# Altium PCB PCB1.PcbDoc
Units mm, origin at the board's own origin, x right, y up, seen from the top; angles counter-clockwise.
Board outline 100 x 100 mm, 4 copper layers (Top Layer, GND, PWR, Bottom Layer), stack 1.592 mm thick; 58 components, 34 nets, 208 pads, 37 vias.
Unrouted connection lines stored in the file: 47.
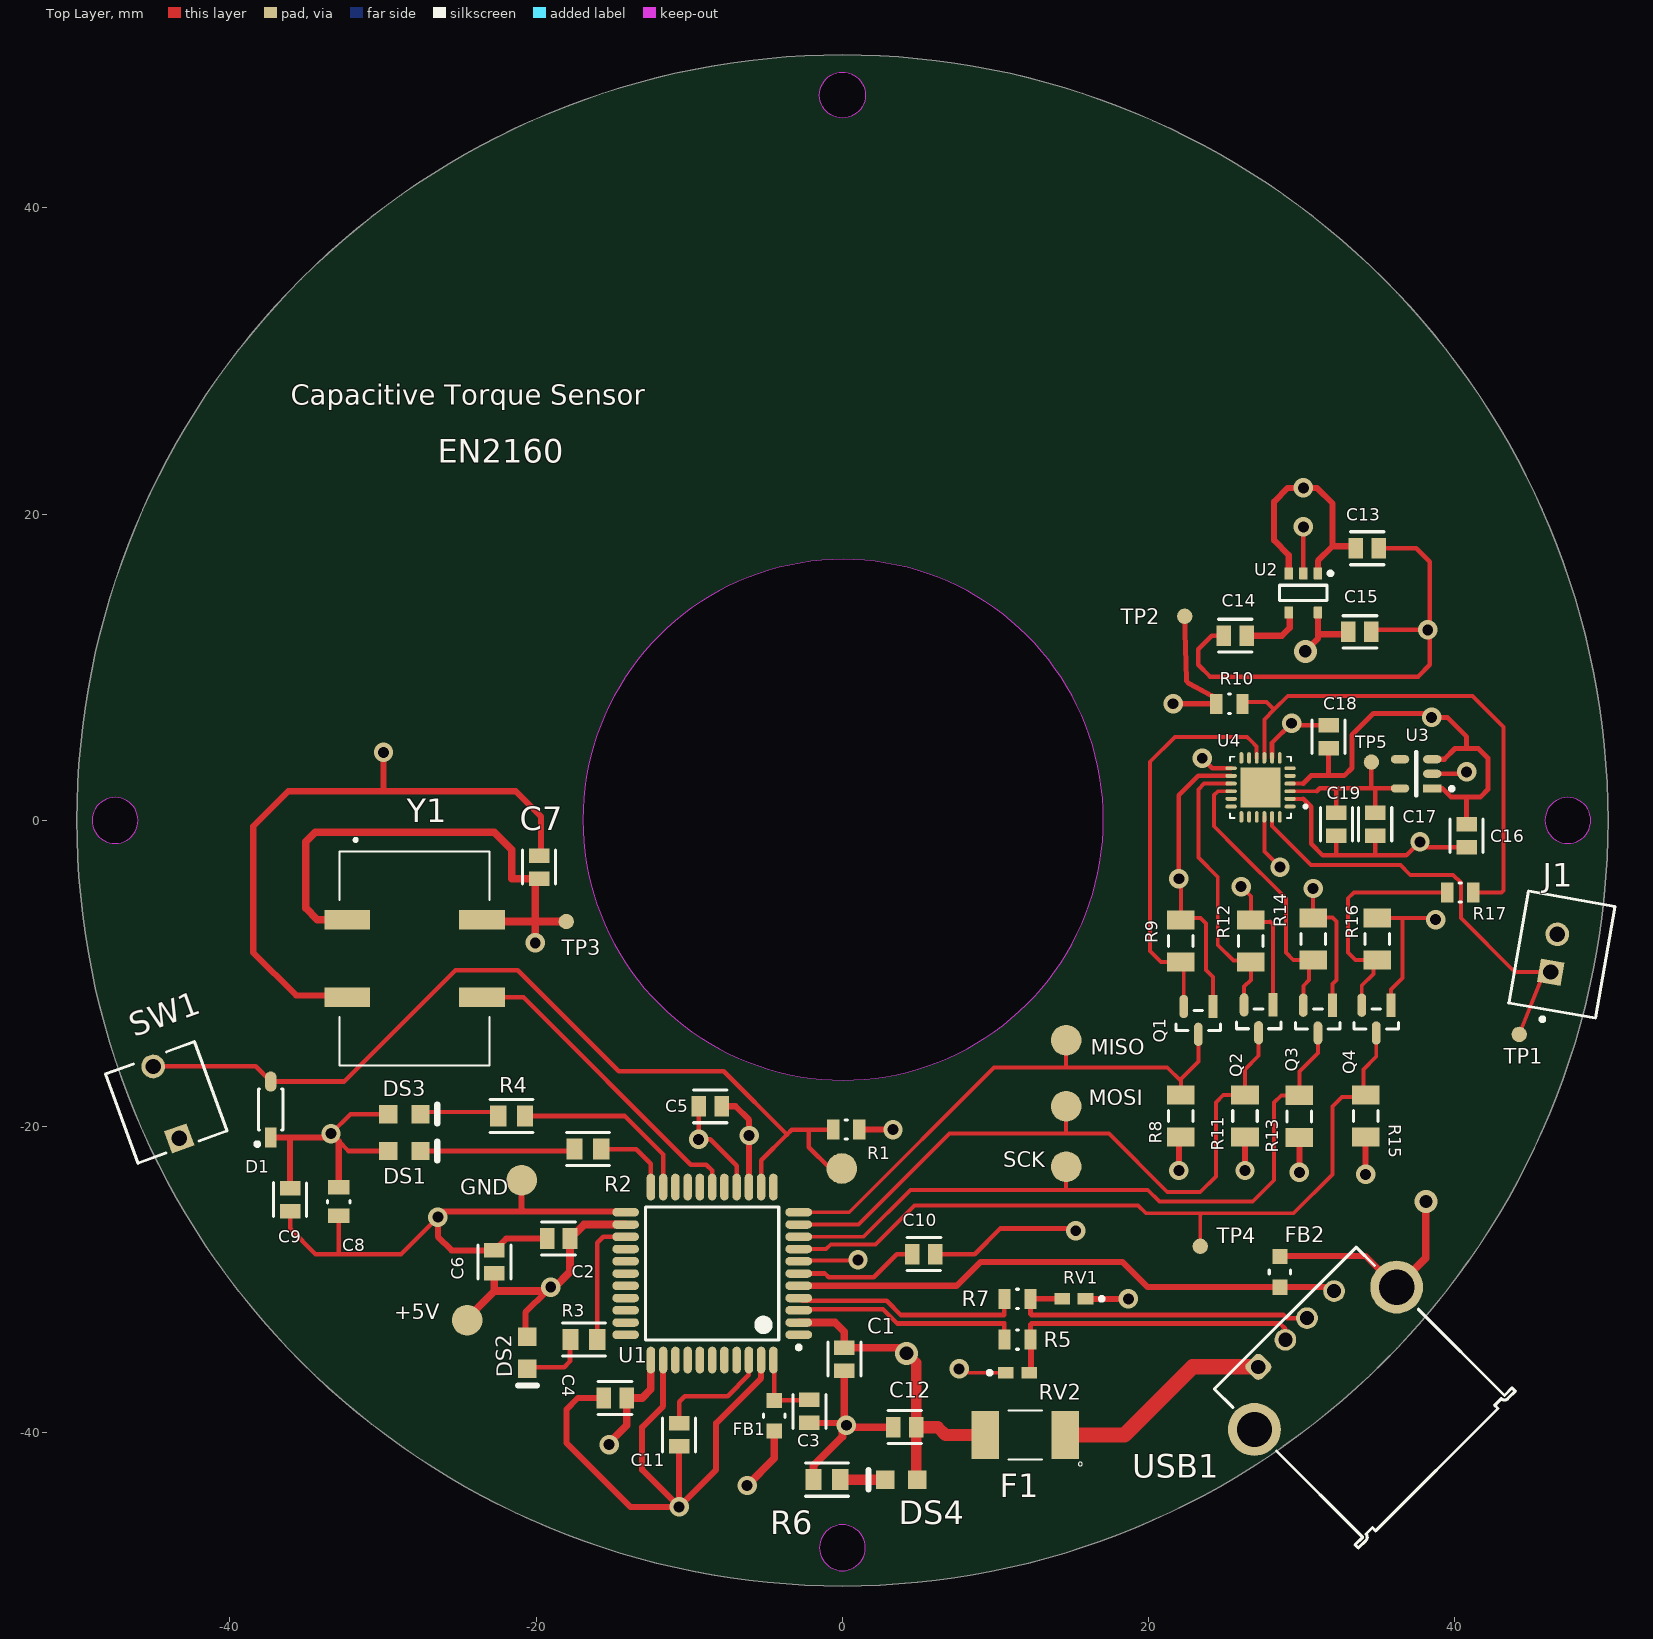
[diagram p0: Top Layer view]
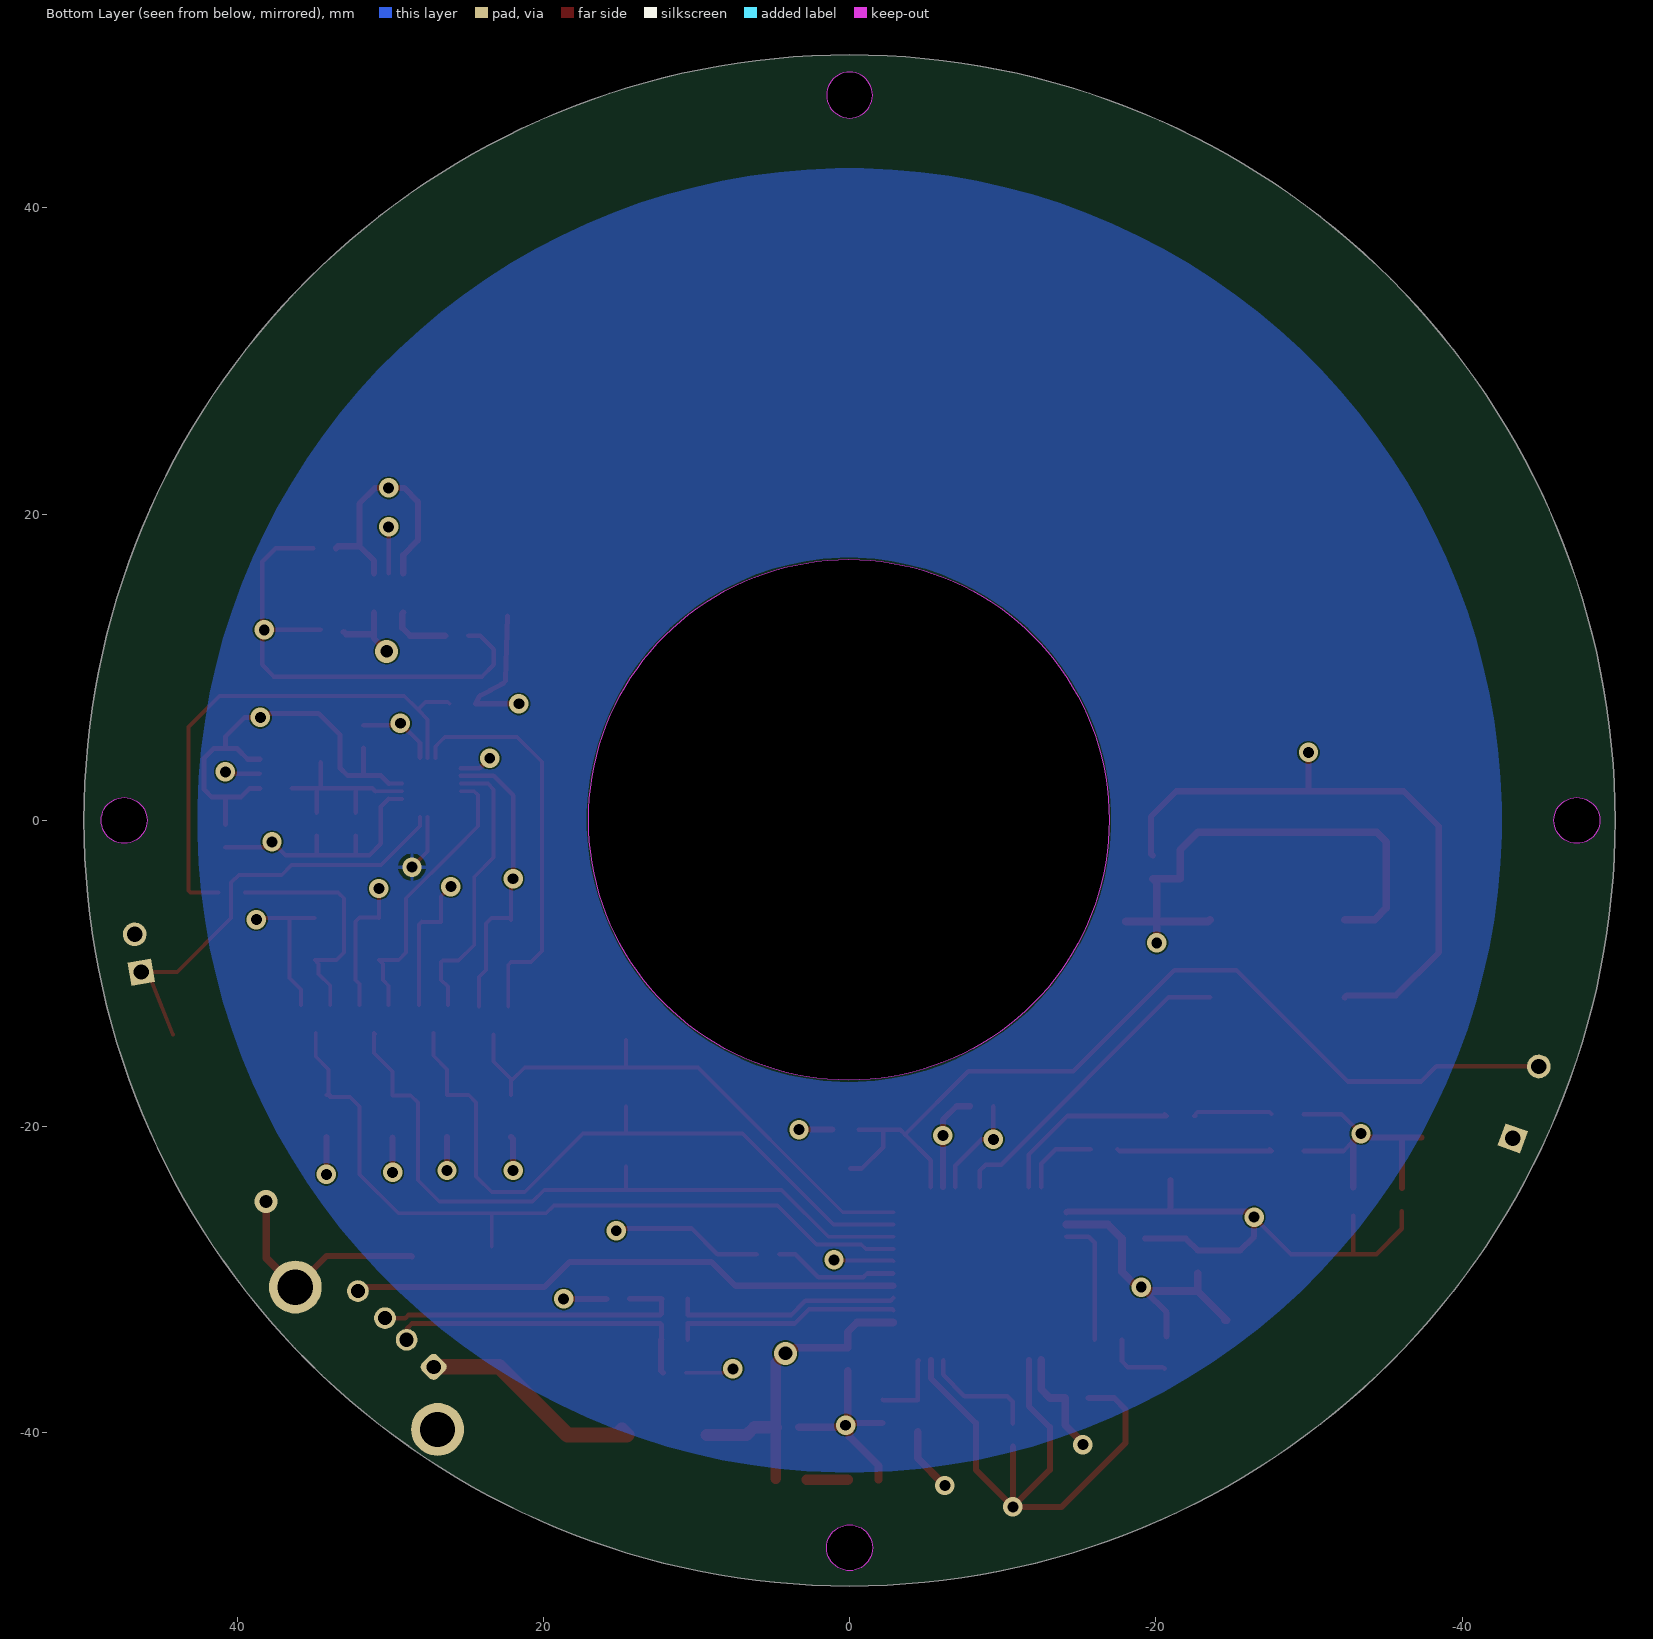
[diagram p1: Bottom Layer view, seen from below]
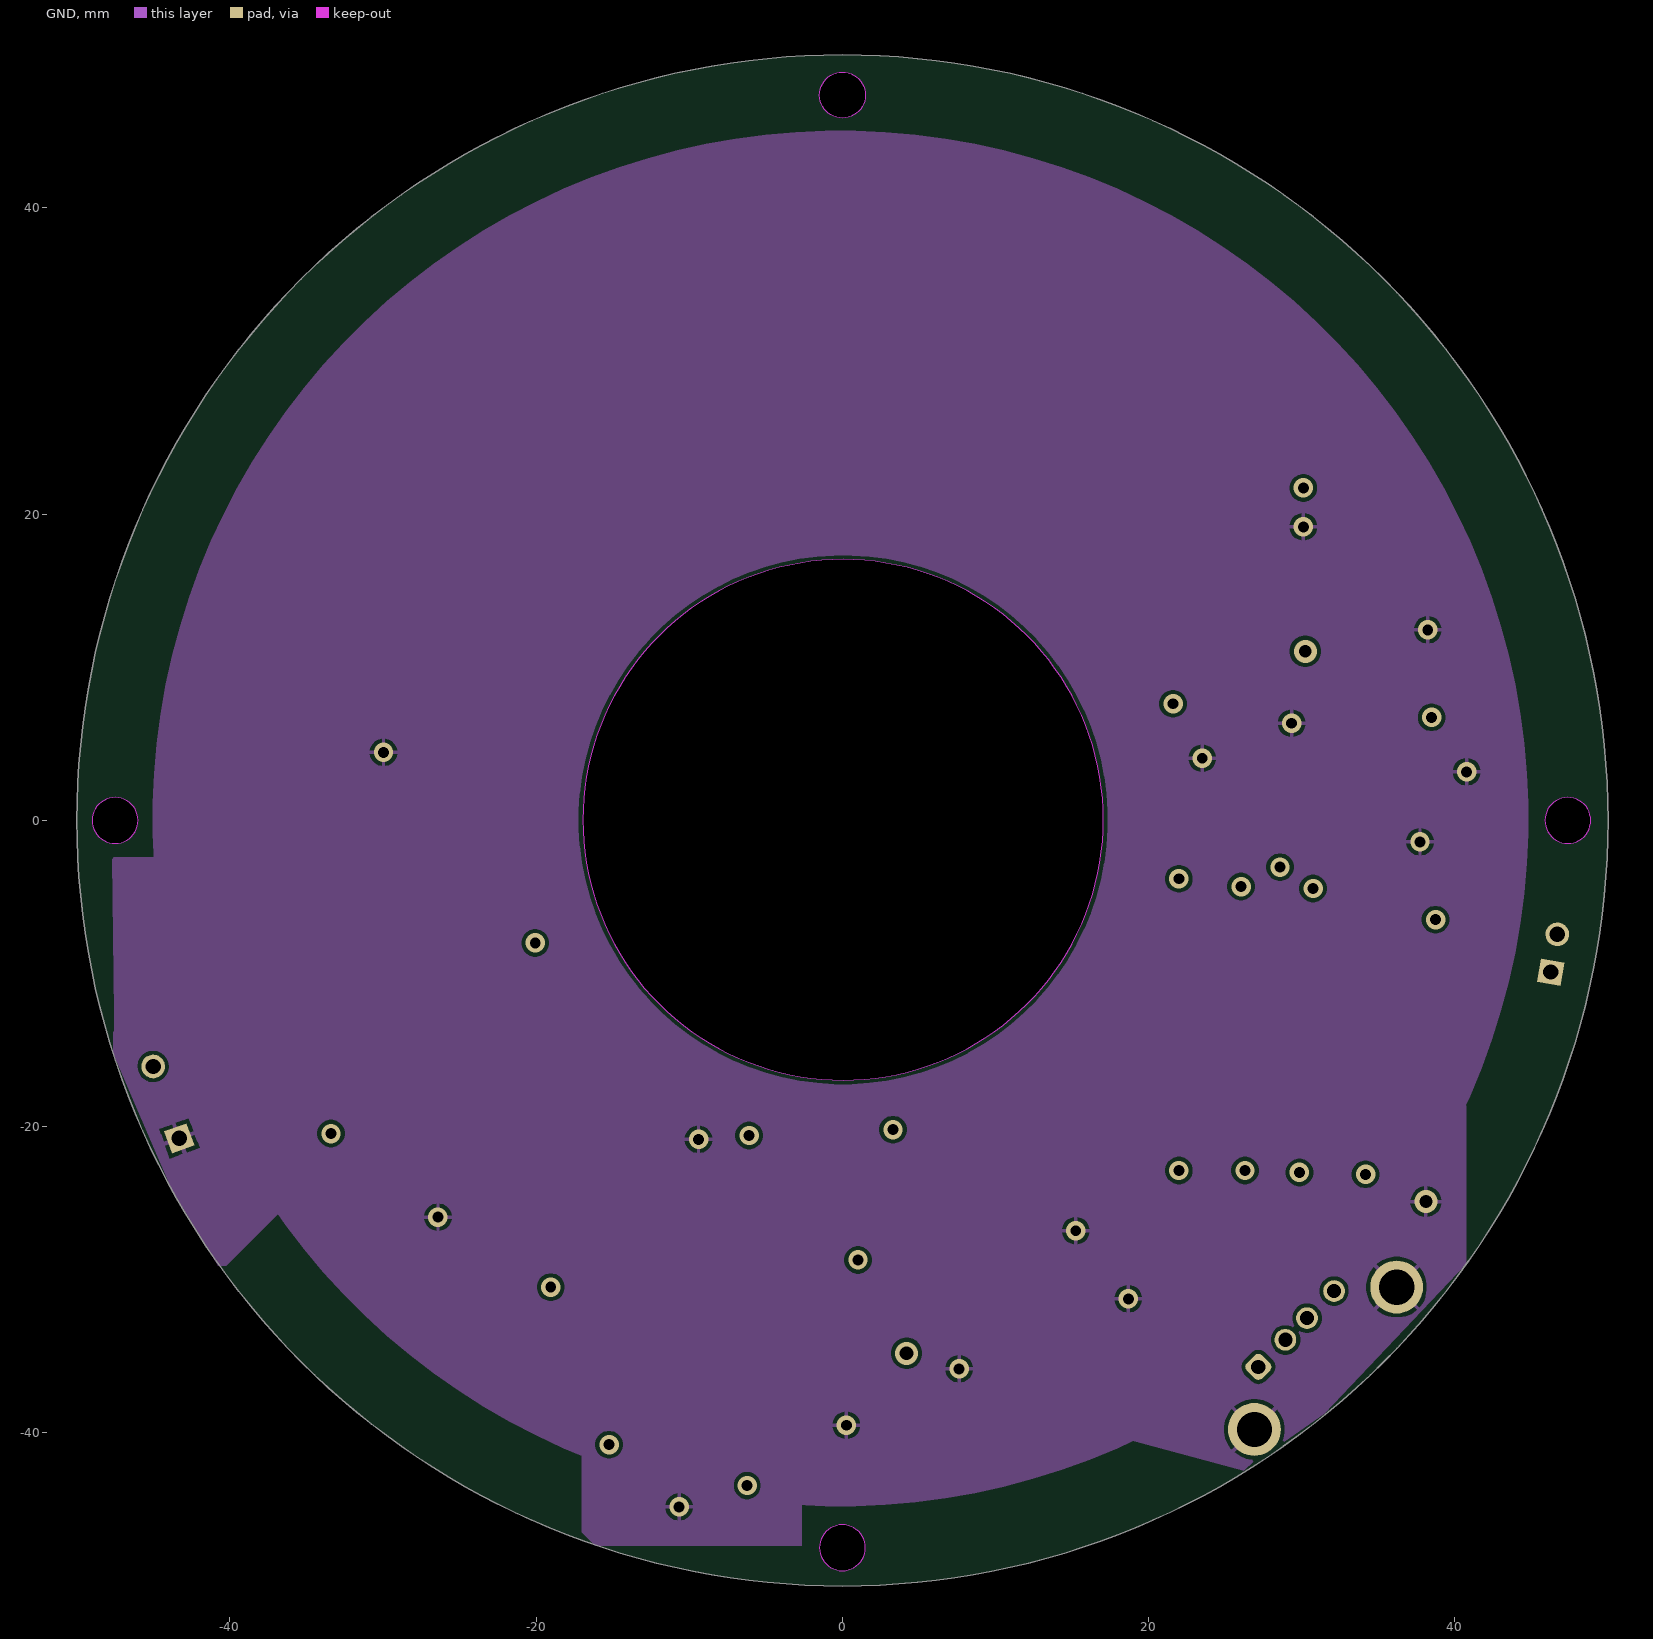
[diagram p2: GND]
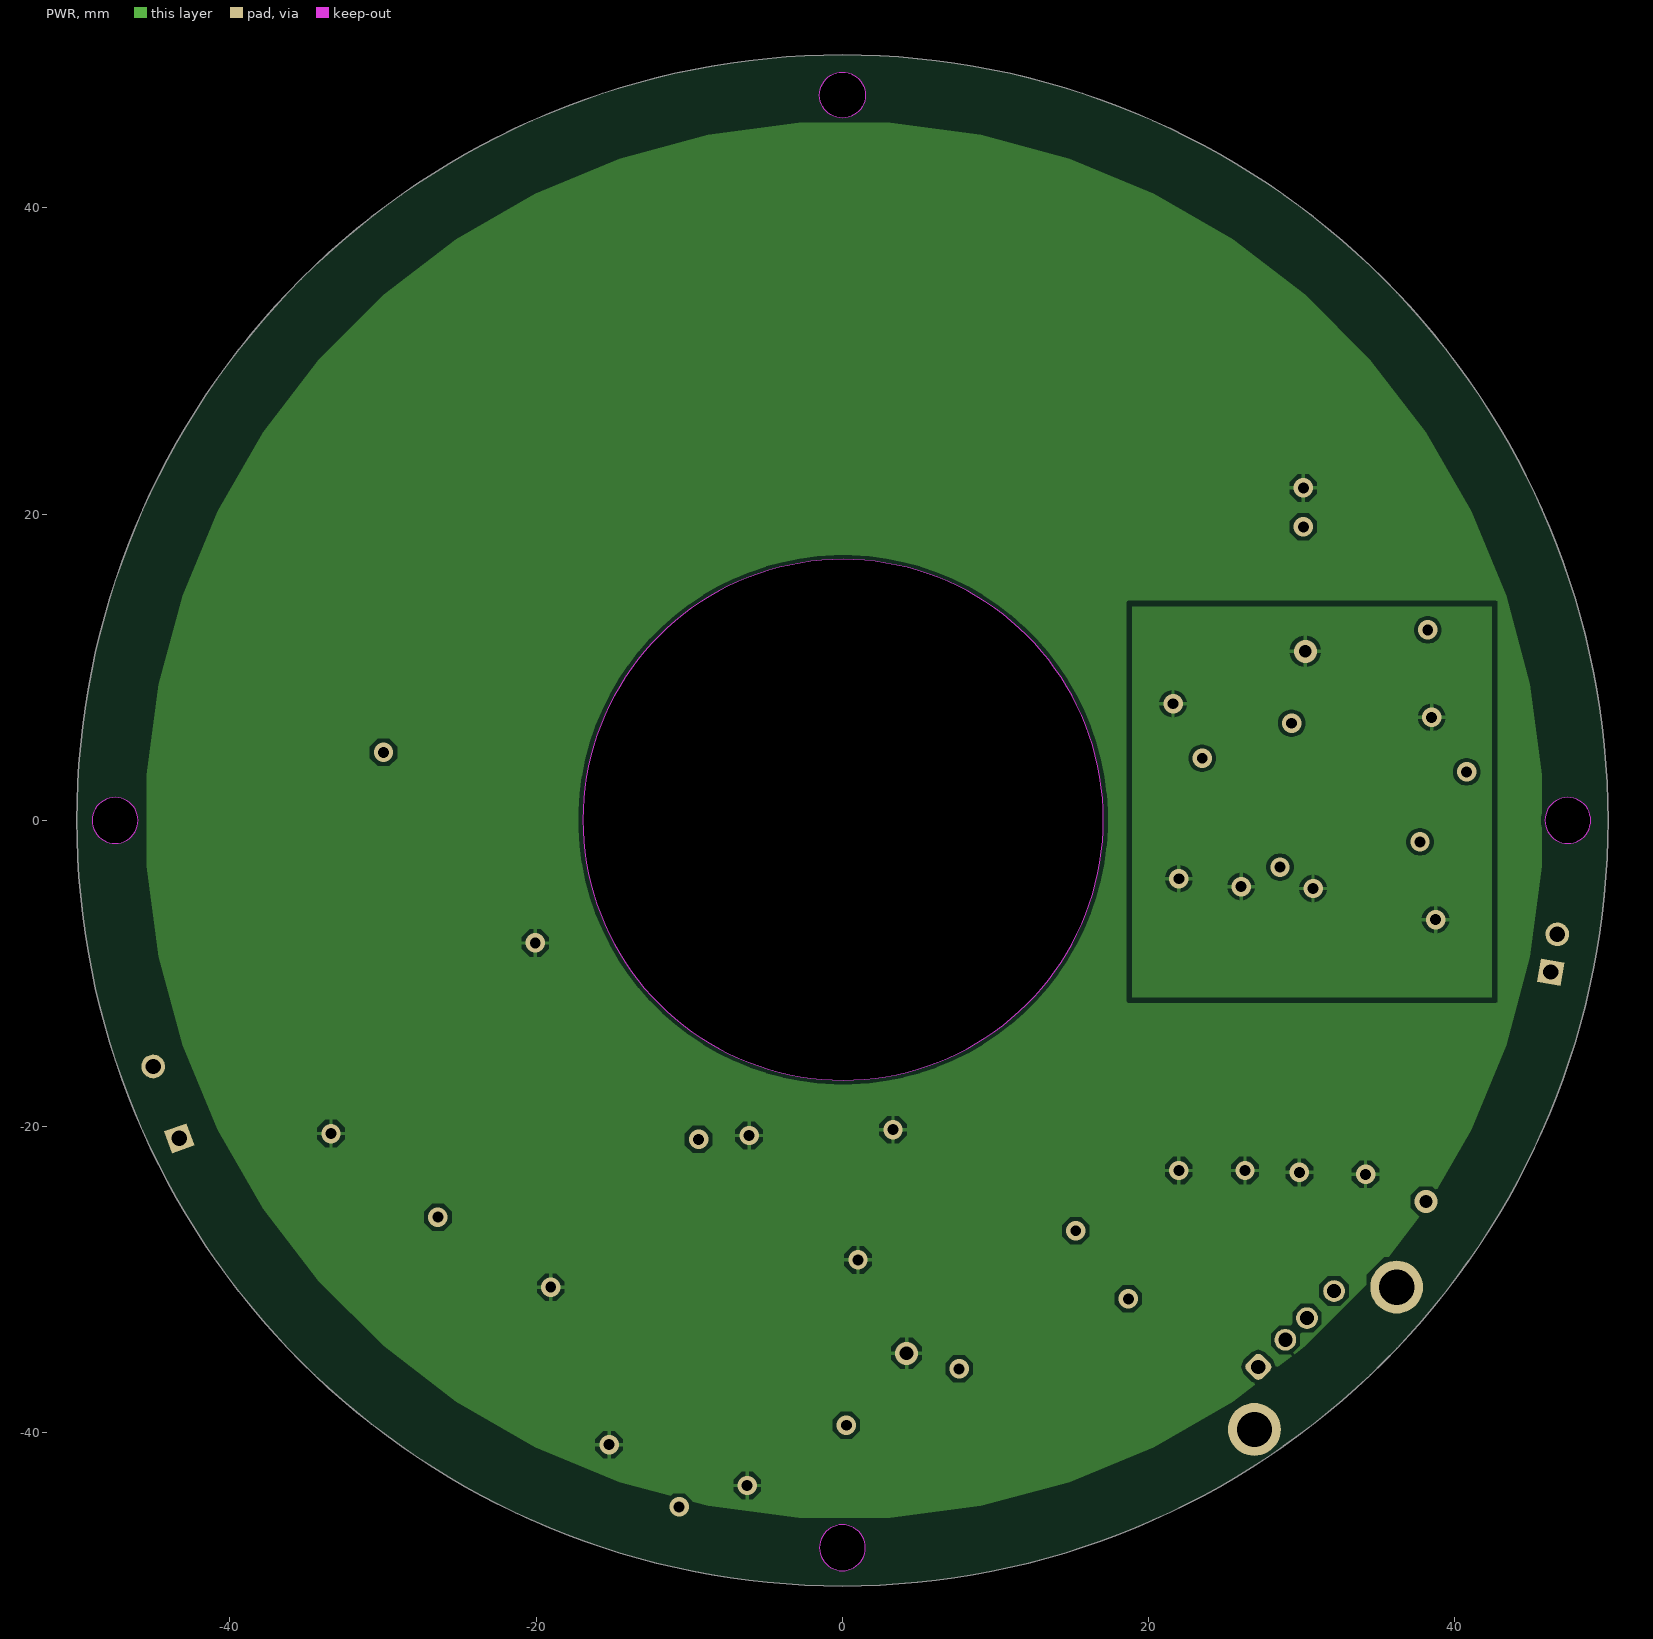
[diagram p3: PWR]
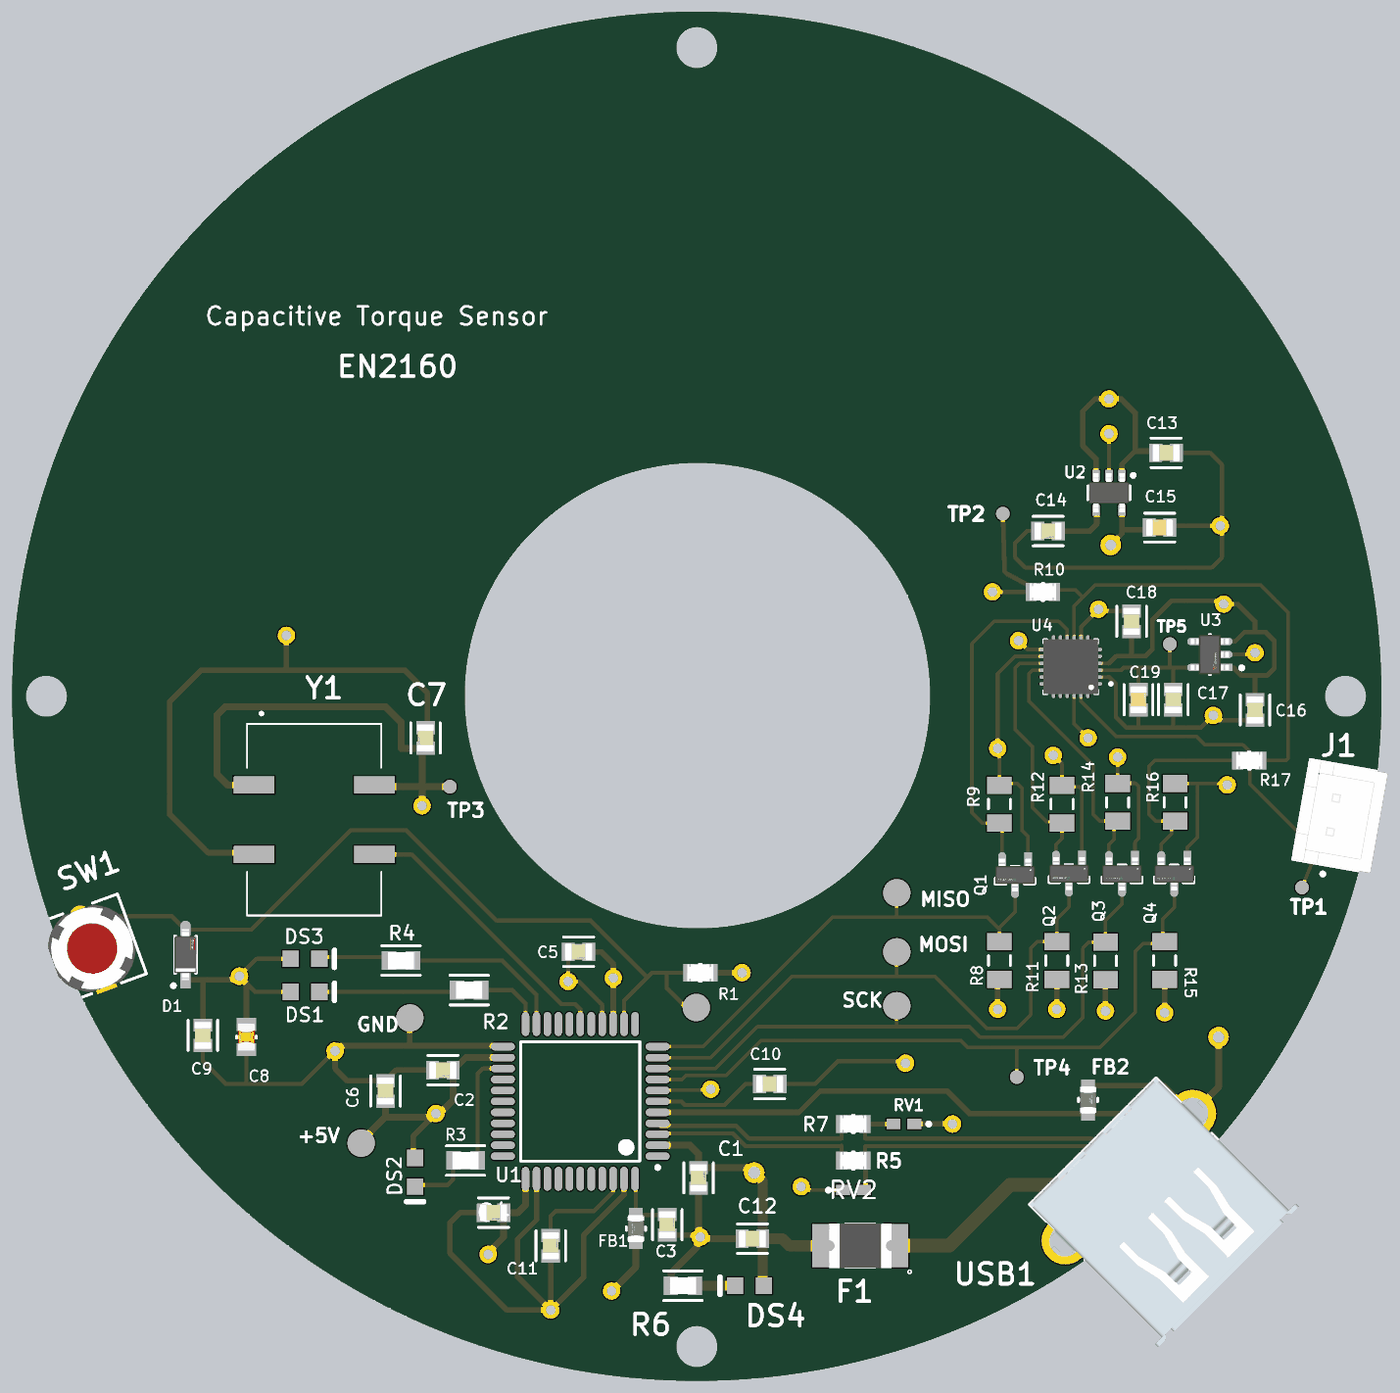
[diagram p4: 3D render of the assembled board from above, using the file's embedded part models]

## Layer stack, top to bottom
Top Solder: solder mask 0.0102, Solder Resist, Dk 3.5
Top Layer: signal copper 0.0356
Dielectric 2: prepreg 0.2104, PP-006, Dk 4.1
GND: signal copper 0.0175
Dielectric 1: dielectric 1.065, FR-4, Dk 4.8
PWR: signal copper 0.0175
Dielectric 3: prepreg 0.2104, PP-006, Dk 4.1
Bottom Layer: signal copper 0.0356
Bottom Solder: solder mask 0.0102, Solder Resist, Dk 3.5

## Board outline
-50,0 ccw(c0,0) 0,-50 ccw(c0,0) 50,0 ccw(c0,0) 0,50 ccw(c0,0)
cut-out: -16.956,0.044 ccw(c0.044,0.044) 0.044,-16.956 ccw(c0.044,0.044) 17.044,0.044 ccw(c0.044,0.044) 0.044,17.044 ccw(c0.044,0.044)
cut-out: -1.5,-47.498 ccw(c0,-47.498) 0,-48.998 ccw(c0,-47.498) 1.5,-47.498 ccw(c0,-47.498) 0,-45.998 ccw(c0,-47.498)
cut-out: 45.871,0 ccw(c47.371,0) 47.371,-1.5 ccw(c47.371,0) 48.871,0 ccw(c47.371,0) 47.371,1.5 ccw(c47.371,0)
cut-out: -47.498,-1.5 ccw(c-47.498,0) -45.998,0 ccw(c-47.498,0) -47.498,1.5 ccw(c-47.498,0) -48.998,0 ccw(c-47.498,0)
cut-out: 0,45.871 cw(c0,47.371) -1.5,47.371 cw(c0,47.371) 0,48.871 cw(c0,47.371) 1.5,47.371 cw(c0,47.371)

## Design rules (kind name [scope] priority, off if disabled: settings)
Clearance Clearance_1 [OnMid vs OnMid] p1: gap=0.1 ignorepadtopadclearanceinfootprint=FALSE
Clearance Clearance_2 [(ExistsOnLayer('Top Layer') Or ExistsOnLayer('Bottom Layer')) vs (ExistsOnLayer('Top Layer') Or ExistsOnLayer('Bottom Layer'))] p2: gap=0.1 ignorepadtopadclearanceinfootprint=FALSE
Clearance Clearance_3 [OnMid vs OnMid] p3: gap=0.2 ignorepadtopadclearanceinfootprint=FALSE
Clearance Clearance_4 [(ExistsOnLayer('Top Layer') Or ExistsOnLayer('Bottom Layer')) vs (ExistsOnLayer('Top Layer') Or ExistsOnLayer('Bottom Layer'))] p4: gap=0.2 ignorepadtopadclearanceinfootprint=FALSE
Clearance Clearance_5 [OnMid vs OnMid] p5: gap=0.254 ignorepadtopadclearanceinfootprint=FALSE
Clearance Clearance_6 [(ExistsOnLayer('Top Layer') Or ExistsOnLayer('Bottom Layer')) vs (ExistsOnLayer('Top Layer') Or ExistsOnLayer('Bottom Layer'))] p6: gap=0.254 ignorepadtopadclearanceinfootprint=FALSE
Clearance Clearance_1 [(ExistsOnLayer('GND') Or ExistsOnLayer('PWR')) vs (ExistsOnLayer('GND') Or ExistsOnLayer('PWR'))] p7: gap=0.254 ignorepadtopadclearanceinfootprint=FALSE sourcerule=45 cellrowname=All cellrowtype=0 cellcolname=All cellcoltype=0 innerlayers=TRUE
Clearance Clearance_2 [(ExistsOnLayer('Top Layer') Or ExistsOnLayer('Bottom Layer')) vs (ExistsOnLayer('Top Layer') Or ExistsOnLayer('Bottom Layer'))] p8: gap=0.254 ignorepadtopadclearanceinfootprint=FALSE sourcerule=45 cellrowname=All cellrowtype=0 cellcolname=All cellcoltype=0 outerlayers=TRUE
Clearance [All] p9: gap=0.254 ignorepadtopadclearanceinfootprint=FALSE miname0="All Nets" mitype0=2
DiffPairsRouting DifferentialPairsRouting_1 [All] p1: maxlimit=0.254 minlimit=0.254 mostfreqgap=0.254 toplayer_minwidth=0.254 toplayer_maxwidth=0.4 toplayer_prefwidth=0.3 midlayer1_minwidth=0.381 midlayer1_maxwidth=0.381 midlayer1_prefwidth=0.381 midlayer2_minwidth=0.381 midlayer2_maxwidth=0.381 midlayer2_prefwidth=0.381 bottomlayer_minwidth=0.254 bottomlayer_maxwidth=0.254 bottomlayer_prefwidth=0.254 maxuncoupledlength=0.254
DiffPairsRouting [All] p2: maxlimit=0.254 minlimit=0.254 mostfreqgap=0.254 toplayer_minwidth=0.381 toplayer_maxwidth=0.381 toplayer_prefwidth=0.381 midlayer1_minwidth=0.381 midlayer1_maxwidth=0.381 midlayer1_prefwidth=0.381 midlayer2_minwidth=0.381 midlayer2_maxwidth=0.381 midlayer2_prefwidth=0.381 bottomlayer_minwidth=0.381 bottomlayer_maxwidth=0.381 bottomlayer_prefwidth=0.381 maxuncoupledlength=12.7
MinimumSolderMaskSliver [All] p1: minsoldermaskwidth=0.024
PlaneClearance PowerPlaneClearance_1 [All] p1: clearance=0.7
PlaneClearance [All] p2: clearance=0.508
PolygonConnect [All] p1: connectstyle=Relief reliefconductorwidth=0.254 reliefentries=4 polygonreliefangle="90 Angle" airgapwidth=0.254
RoutingVias [All] p1: holewidth=0.711 width=1.27 viastyle="Through Hole" minholewidth=0.711 minwidth=1.27 maxholewidth=0.711 maxwidth=1.27
SilkToSolderMaskClearance [IsPad] p1: minsilkscreentomaskgap=0.19 clearancetoexposedcopper=TRUE
SolderMaskExpansion [All] p1: expansion=0.102 istentingtop=FALSE
Width [All] p1: maxlimit=2 minlimit=0.254 preferedwidth=0.254 midlayer1_maxwidth=0.4 midlayer2_maxwidth=0.4 minimp=50.000000 maximp=50.000000 favimp=50.000000
Width Width_1 [All] p2: maxlimit=2 minlimit=0.254 preferedwidth=0.254
26 further rules are at their usual default settings.

## Classes and differential pairs
component class U_USB: C12 DS4 F1 FB2 R5 R6 R7 RV1 RV2 USB1
component class U_Sensor: C18 C19 J1 Q1 Q2 Q3 Q4 R8 R9 R10 R11 R12 R13 R14 R15 R16 R17 U4
component class U_Power: C13 C14 C15 C16 C17 U2 U3
component class U_MCU: C1 C2 C3 C4 C5 C6 C7 C8 C9 C10 C11 D1 DS1 DS2 DS3 FB1 R1 R2 R3 R4 SW1 U1 Y1
differential pair D_D: +D_P -D_N
differential pair D_USB: +USB_P -USB_N

## Components (designator, comment, footprint, x,y, rotation, side; value= is the part's Value field where it differs from the comment)
C1 "C0805C104J8RACTU" FP-C0805C-DN-MFG 0.127,-35.179 r270 top value="0.10 μF"
C2 "C0805C104J8RACTU" FP-C0805C-DN-MFG -18.542,-27.305 r180 top value="0.10 μF"
C3 "C0805C104J8RACTU" FP-C0805C-DN-MFG -2.159,-38.596 r270 top value="0.10 μF"
C4 "C0805C104J8RACTU" FP-C0805C-DN-MFG -14.847,-37.719 r180 top value="0.10 μF"
C5 "C0805C104J8RACTU" FP-C0805C-DN-MFG -8.636,-18.669 r180 top value="0.10 μF"
C6 "C0805C106K8PACTU" FP-C0805C-DG-MFG -22.733,-28.829 r90 top value=10uF
C7 "C0805C104J8RACTU" FP-C0805C-DN-MFG -19.812,-3.048 r90 top value="0.10 μF"
C8 "CC0805KRX7R7BB104" FP-CC0805-0_85-MFG -32.893,-24.892 r270 top value="100 nF"
C9 "C0805C106K8PACTU" FP-C0805C-DG-MFG -36.068,-24.765 r270 top value=10uF
C10 "C0805C106K8PACTU" FP-C0805C-DG-MFG 5.322,-28.321 r0 top value=10uF
C11 "C0805C104J8RACTU" FP-C0805C-DN-MFG -10.668,-40.132 r270 top value="0.10 μF"
C12 "C0805C106K8PACTU" FP-C0805C-DG-MFG 4.064,-39.624 r180 top value=10uF
C13 "C0805C106K8PACTU" FP-C0805C-DG-MFG 34.278,17.78 r0 top value=10uF
C14 "10nF" FP-C0805C-DN-MFG 25.654,12.065 r180 top value="10,000 pF"
C15 "4.7uF" FP-C0805C475K8PACTU-MFG 33.794,12.319 r0 top
C16 "C0805C106K8PACTU" FP-C0805C-DG-MFG 40.767,-1.004 r270 top value=10uF
C17 "C0805C106K8PACTU" FP-C0805C-DG-MFG 34.798,-0.254 r270 top value=10uF
C18 "C0805C106K8PACTU" FP-C0805C-DG-MFG 31.75,5.473 r90 top value=10uF
C19 "4.7uF" FP-C0805C475K8PACTU-MFG 32.258,-0.254 r270 top
D1 "1N4148W-TP" FP-SOD-123-IPC_A -37.338,-18.876 r90 top
DS1 "HSMG-C170" AVAG-HSMX-C170_V -28.609,-21.59 r0 top
DS2 "HSMG-C170" AVAG-HSMX-C170_V -20.574,-34.764 r270 top
DS3 "HSMG-C170" AVAG-HSMX-C170_V -28.609,-19.177 r0 top
DS4 "HSMG-C170" AVAG-HSMX-C170_V 3.844,-43.053 r180 top
F1 "1812L050PR" FUSM4632X75 11.938,-40.132 r180 top
FB1 "MH2029-300Y" FP-MH2029-MFG -4.445,-38.878 r270 top value=30Ω
FB2 "MH2029-300Y" FP-MH2029-MFG 28.575,-29.48 r90 top value=30Ω
J1 "B2B-XH-A(LF)(SN)" FP-B2B-XH-A_LF_SN-MFG 46.99,-8.763 r80 top locked
Q1 "BSS138" FP-318-08-IPC_B 23.241,-13.06 r270 top
Q2 "BSS138" FP-318-08-IPC_B 27.178,-12.954 r270 top
Q3 "BSS138" FP-318-08-IPC_B 31.049,-12.975 r270 top
Q4 "BSS138" FP-318-08-IPC_B 34.864,-12.975 r270 top
R1 "CRCW080522R0FKEA" FP-CRCW0805-e3-IPC_C 0.254,-20.193 r0 top
R2 "330 R" FP-CR0805-IPC_B -16.625,-21.463 r180 top
R3 "330 R" FP-CR0805-IPC_B -16.891,-33.909 r180 top
R4 "330 R" FP-CR0805-IPC_B -21.602,-19.304 r180 top
R5 "CRCW080522R0FKEA" FP-CRCW0805-e3-IPC_C 11.43,-33.909 r180 top
R6 "330 R" FP-CR0805-IPC_B -1.016,-43.053 r0 top
R7 "CRCW080522R0FKEA" FP-CRCW0805-e3-IPC_C 11.43,-31.242 r180 top
R8 "10k" RESC3116X65X50NL20T20 22.098,-19.304 r270 top
R9 "10k" RESC3116X65X50NL20T20 22.098,-7.874 r90 top
R10 "CRCW080522R0FKEA" FP-CRCW0805-e3-IPC_C 25.273,7.62 r180 top
R11 "10k" RESC3116X65X50NL20T20 26.289,-19.304 r270 top
R12 "10k" RESC3116X65X50NL20T20 26.67,-7.874 r90 top
R13 "10k" RESC3116X65X50NL20T20 29.845,-19.326 r270 top
R14 "10k" RESC3116X65X50NL20T20 30.734,-7.747 r90 top
R15 "10k" RESC3116X65X50NL20T20 34.163,-19.304 r270 top
R16 "10k" RESC3116X65X50NL20T20 34.925,-7.747 r90 top
R17 "CRCW080522R0FKEA" FP-CRCW0805-e3-IPC_C 40.348,-4.699 r180 top
RV1 "CG0603MLC-05E" BOUR-CG0603-2_V 15.115,-31.242 r180 top
RV2 "CG0603MLC-05E" BOUR-CG0603-2_V 11.43,-36.068 r0 top
SW1 "EVQ-11L05R" FP-EVQ-11L05R-MFG -44.162,-18.415 r110 top
U1 "ATmega32U4RC-AU" 44ML_N -8.509,-29.591 r180 top
U2 "TPS73633DBVR" DBV0005A_L 30.099,14.859 r270 top
U3 "LP5907MFX-2.85/NOPB" FP-DBV0005A-IPC_C 37.465,3.048 r180 top
U4 "PCAP04-AQFM-24" IC_PCAP04-AQFM-24 27.305,2.159 r180 top
USB1 "61400416021" 61400416021 33.869,-37.445 r45 top
Y1 "ECS-8FMX-160-TR" OSC_ECS-8FMX-160-TR -27.94,-9.017 r270 top

## Footprints (in the part's own frame and the unit in brackets; to place one, negate y for a bottom-side part, rotate by r counter-clockwise, add the part's x,y. Pads: shape width x height; smd on the part's side, far side on the other; paste and mask are expansions set on the pad)
44ML_N [mm] "Thin QFP, 44-Leads, Body 10x10mm, Pitch 0.8mm, IPC Medium Density"
  oval 1.75x0.55 smd: 1(-5.65,4) 2(-5.65,3.2) 3(-5.65,2.4) 4(-5.65,1.6) 5(-5.65,0.8) 6(-5.65,0) 7(-5.65,-0.8) 8(-5.65,-1.6) 9(-5.65,-2.4) 10(-5.65,-3.2) 11(-5.65,-4) 23(5.65,-4) 24(5.65,-3.2) 25(5.65,-2.4) 26(5.65,-1.6) 27(5.65,-0.8) 28(5.65,0) 29(5.65,0.8) 30(5.65,1.6) 31(5.65,2.4) 32(5.65,3.2) 33(5.65,4)
  oval 0.55x1.75 smd: 12(-4,-5.65) 13(-3.2,-5.65) 14(-2.4,-5.65) 15(-1.6,-5.65) 16(-0.8,-5.65) 17(0,-5.65) 18(0.8,-5.65) 19(1.6,-5.65) 20(2.4,-5.65) 21(3.2,-5.65) 22(4,-5.65) 34(4,5.65) 35(3.2,5.65) 36(2.4,5.65) 37(1.6,5.65) 38(0.8,5.65) 39(0,5.65) 40(-0.8,5.65) 41(-1.6,5.65) 42(-2.4,5.65) 43(-3.2,5.65) 44(-4,5.65)
  silkscreen extent -5.77,-4.35 4.35,4.95, body extent -5,-5 5,5, height 1.2
61400416021 [mm] "USB 2.0 Type A Horizontal"
  rrect50% 1.42x1.42 hole 0.92: 1(-3.5,5.99)
  round 1.42 hole 0.92: 2(-1,5.99) 3(1,5.99) 4(3.5,5.99)
  round 3.45 hole 2.3: Shell(-6.57,3.28) Shell(6.57,3.28)
  silkscreen extent -7.25,-7 7.25,7, body extent -8,-7 8,7, height 7.63
AVAG-HSMX-C170_V [mm] "SMD, 2-Leads, Body 2x1.25mm, Height 0.8mm"
  rect 1.2x1.2 smd: 1(-1.05,0) 2(1.05,0)
  silkscreen extent 2.15,-0.62 2.15,0.62, body extent -1,-0.63 1,0.63, height 0.8
BOUR-CG0603-2_V [mm] "SMD, 2-Leads, Body 1.6x0.8mm, Pitch 1.52mm"
  rect 1.02x0.76 smd: 1(-0.76,0) 2(0.76,0)
  silkscreen extent -1.94,-0.12 -1.7,0.12, body extent -0.8,-0.4 0.8,0.4, height 0.55
DBV0005A_L [mm] "SOT23, 5-Leads, Body 3.05x1.75mm, Pitch 0.95mm, IPC High Density"
  rrect18% 0.8x0.55 smd: 1(-1.275,0.95) 2(-1.275,0) 3(-1.275,-0.95) 4(1.275,-0.95) 5(1.275,0.95)
  silkscreen extent -1.4,-1.55 0.5,1.9, body extent -1.42,-1.46 1.42,1.46, height 1.08
FP-318-08-IPC_B [mm]
  rect 1.524x0.578 smd paste+0 mask+0: 1(-0.91,0.95)
  rrect100% 1.524x0.578 smd paste+0 mask+0: 2(-0.91,-0.95) 3(0.91,0)
  silkscreen extent -0.65,-1.45 0.65,1.45, body extent -1.92,-1.7 1.92,1.7, height 0.25
FP-B2B-XH-A_LF_SN-MFG [mm]
  rect 1.55x1.55 hole 1 paste-2539.97 mask+0: 1(-1.25,0.525)
  round 1.55 hole 1 paste-2539.97 mask+0: 2(1.25,0.525)
  silkscreen extent -4.5,-2.87 3.7,2.88, body extent -3.8,-2.98 3.8,2.98, height 0.25
FP-C0805C475K8PACTU-MFG [mm]
  rect 0.95x1.35 smd paste+0 mask+0: 1(-0.75,0) 2(0.75,0)
  silkscreen extent -1.1,-1.05 1.1,1.05, body extent -1.4,-0.85 1.4,0.85, height 0.25
FP-C0805C-DG-MFG [mm]
  rect 0.95x1.35 smd paste+0 mask+0: 1(-0.75,0) 2(0.75,0)
  silkscreen extent -1.11,-1.08 1.1,1.07, body extent -1.4,-0.85 1.4,0.85, height 0.25
FP-C0805C-DN-MFG [mm]
  rect 0.95x1.35 smd paste+0 mask+0: 1(-0.75,0) 2(0.75,0)
  silkscreen extent -1.1,-1.07 1.1,1.07, body extent -1.4,-0.85 1.4,0.85, height 0.25
FP-CC0805-0_85-MFG [mm]
  rect 0.95x1.4 smd paste+0 mask+0: 1(-0.925,0) 2(0.925,0)
  silkscreen extent -0.07,-0.73 0.07,0.73, body extent -1.6,-1.05 1.6,1.05, height 0.25
FP-CR0805-IPC_B [mm]
  rect 1.058x1.362 smd paste+0 mask+0: 1(-0.877,0) 2(0.877,0)
  silkscreen extent -1.41,-1.08 1.41,1.08, body extent -1.66,-0.93 1.66,0.93, height 0.25
FP-CRCW0805-e3-IPC_C [mil]
  rect 31.75x51.5 smd paste+0 mask+0: 1(-33.5,0) 2(33.5,0)
  silkscreen extent -3,-25 3,25, body extent -53,-31 53,31, height 10
FP-DBV0005A-IPC_C [mm]
  rect 1.205x0.532 smd paste+0 mask+0: 1(-1.05,0.95)
  rrect100% 1.205x0.532 smd paste+0 mask+0: 2(-1.05,0) 3(-1.05,-0.95) 4(1.05,-0.95) 5(1.05,0.95)
  silkscreen extent -2.45,-1.45 0.05,1.45, body extent -1.75,-1.55 1.75,1.55, height 0.25
FP-EVQ-11L05R-MFG [mm]
  rect 1.55x1.55 hole 1 paste-2539.97 mask+0: A(-2.5,0)
  round 1.55 hole 1 paste-2539.97 mask+0: B(2.5,0)
  silkscreen extent -3.1,-3.1 3.1,3.1, body extent -3.37,-3.2 3.37,3.2, height 0.25
FP-MH2029-MFG [mm]
  rect 1x1 smd paste+0 mask+0: 1(-1,0) 2(1,0)
  silkscreen extent -0.13,-0.7 0.13,0.7, body extent -1.6,-0.8 1.6,0.8, height 0.25
FP-SOD-123-IPC_A [mm]
  rect 1.308x0.762 smd paste+0 mask+0: 1(-1.825,0)
  rrect100% 1.308x0.762 smd paste+0 mask+0: 2(1.825,0)
  silkscreen extent -2.39,-0.8 1.35,1.01, body extent -2.98,-1.3 2.98,1.3, height 0.25
FUSM4632X75 [mm]
  rect 1.78x3.15 smd: 1(-2.615,0) 2(2.615,0)
  silkscreen extent -3.73,-1.6 1.1,2.03, body extent -2.27,-1.62 2.27,1.62, height 1.25
IC_PCAP04-AQFM-24 [mm]
  oval 0.75x0.25 smd mask+0.05: 1(-1.925,1.25) 2(-1.925,0.75) 3(-1.925,0.25) 4(-1.925,-0.25) 5(-1.925,-0.75) 6(-1.925,-1.25) 13(1.925,-1.25) 14(1.925,-0.75) 15(1.925,-0.25) 16(1.925,0.25) 17(1.925,0.75) 18(1.925,1.25)
  oval 0.25x0.75 smd mask+0.05: 7(-1.25,-1.925) 8(-0.75,-1.925) 9(-0.25,-1.925) 10(0.25,-1.925) 11(0.75,-1.925) 12(1.25,-1.925) 19(1.25,1.925) 20(0.75,1.925) 21(0.25,1.925) 22(-0.25,1.925) 23(-0.75,1.925) 24(-1.25,1.925)
  rect 2.6x2.6 smd paste-0.48 mask+0.05: 25(0,0)
  silkscreen extent -3.04,-2 2,2, body extent -2,-2 2,2, height 1
OSC_ECS-8FMX-160-TR [mm]
  rect 1.27x3 smd: 1(-2.54,-4.4) 2(2.54,-4.4) 3(2.54,4.4) 4(-2.54,4.4)
  silkscreen extent -7.85,-4.9 7,4.9
RESC3116X65X50NL20T20 [mm] "Chip Resistor, 2-Leads, Body 3.10x1.60mm, IPC Medium Density"
  rect 1.25x1.8 smd: 1(-1.375,0) 2(1.375,0)
  silkscreen extent -0.35,-0.8 0.35,0.8, body extent -1.65,-0.9 1.65,0.9, height 0.65

## Part data
C1 C2 C3 C4 C5 C7 C11: library part CMP-03020-032188-1, "CAP CER 0.1UF 10V 5% X7R 0805", Capacitance="0.10 μF", Manufacturer=KEMET, Package=C0805C-DN, Temperature="-55°C to +125°C", Temperature Characteristic=X7R, Temperature Coefficient=30ppm/°C, Temperature Range High=+125°C, Temperature Range Low=-55°C, Tolerance=0.05, Voltage Rating="10 V", Automotive=No, Category=Cap, ComponentLink2Description=Datasheet, ComponentLink2URL=https://content.kemet.com/datasheets/KEM_C1003_C0G_SMD.pdf, Device Class L1="Passive Components", Device Class L2=Capacitors, Device Class L3="Ceramic Capacitors", Digikey Description="CAP CER 0.1UF 10V 5% X7R 0805", Height=0.88mm, Ipc Land Pattern Name=CAPC200125X78, Lead Free=Yes, Manufacturer Part Number=C0805C104J8RACTU, Material=Ceramic, Mouser Description="Multilayer Ceramic Capacitors MLCC - SMD/SMT 10volts 0.1uF X7R 5%", Octopart=https://octopart.com/c0805c104j8ractu-kemet-11807087, RoHS=TRUE
C6 C12 C18: library part CMP-2007-03243-2, "CAP CER 10UF 10V X5R 0805", 3DS Part Number=220-00001, Capacitance=10uF, Manufacturer=Kemet, Package=C0805C-DG, Temperature="-55°C to +85°C", Temperature Characteristic=X5R, Temperature Coefficient=15%, Temperature Range High=+85°C, Temperature Range Low=-55°C, Tolerance=10%, Voltage=10V, Automotive=No, Category=Cap, ComponentLink2Description=Datasheet, ComponentLink2URL=https://content.kemet.com/datasheets/KEM_C1006_X5R_SMD.pdf, Device Class L1="Passive Components", Device Class L2=Capacitors, Device Class L3="Ceramic Capacitors", Digikey Description="CAP CER 10UF 10V X5R 0805", Height=1.4mm, Ipc Land Pattern Name=CAPC200125X125, Lead Free=Yes, Manufacturer Part Number=C0805C106K8PACTU, Material=Ceramic, Mouser Description="CAP CER 10UF 10V X5R 0805", Octopart=https://octopart.com/c0805c106k8pactu-kemet-98697, RoHS=TRUE, Voltage Rating=10V
C8: library part CMP-1036-04402-6, "CAP CER 0.1UF 16V X7R 0805", Capacitance="100 nF", Manufacturer=Yageo, Package=CC0805-0.85, Temperature="-30°C to +85°C", Temperature Characteristic=X7R, Temperature Range High=+85°C, Temperature Range Low=-30°C, Tolerance=0.1, Voltage Rating="16 V", Automotive=No, Category=Cap, ComponentLink2Description=Datasheet, ComponentLink2URL=http://www.yageo.com/documents/recent/UPY-GPHC_Y5V_6.3V-to-50V_8.pdf, Device Class L1="Passive Components", Device Class L2=Capacitors, Device Class L3="Ceramic Capacitors", Digikey Description="CAP CER 0.1UF 16V X7R 0805", Footprint Url=http://www.yageo.com/exep/pages/download/literatures/UPY-C_GEN_24.pdf, Height=0.95mm, Ipc Land Pattern Name=CAPC200125X85, Lead Free=Yes, Manufacturer Part Number=CC0805KRX7R7BB104, Material=Ceramic, Mouser Description="Multilayer Ceramic Capacitors MLCC - SMD/SMT 100nF 16V X7R 10%", Octopart=https://octopart.com/cc0805krx7r7bb104-yageo-39467769, RoHS=TRUE
C9 C10 C13 C16 C17: library part CMP-2007-03243-2, "CAP CER 10UF 10V X5R 0805", 3DS Part Number=220-00001, Capacitance=1uF, Manufacturer=Kemet, Package=C0805C-DG, Temperature="-55°C to +85°C", Temperature Characteristic=X5R, Temperature Coefficient=15%, Temperature Range High=+85°C, Temperature Range Low=-55°C, Tolerance=10%, Voltage=10V, Automotive=No, Category=Cap, ComponentLink2Description=Datasheet, ComponentLink2URL=https://content.kemet.com/datasheets/KEM_C1006_X5R_SMD.pdf, Device Class L1="Passive Components", Device Class L2=Capacitors, Device Class L3="Ceramic Capacitors", Digikey Description="CAP CER 10UF 10V X5R 0805", Height=1.4mm, Ipc Land Pattern Name=CAPC200125X125, Lead Free=Yes, Manufacturer Part Number=C0805C106K8PACTU, Material=Ceramic, Mouser Description="CAP CER 10UF 10V X5R 0805", Octopart=https://octopart.com/c0805c106k8pactu-kemet-98697, RoHS=TRUE, Voltage Rating=10V
C14: library part CMP-2007-00493-2, "CAP CER 10000PF 25V 5% NP0 0805", Capacitance="10,000 pF", Manufacturer=KEMET, Manufacturer Part Number=C0805C103J3GACTU, Package=C0805C-DN, Temperature="-55°C to +125°C", Temperature Characteristic=C0G, Temperature Coefficient=30ppm/°C, Temperature Range High=+125°C, Temperature Range Low=-55°C, Tolerance=0.05, Voltage Rating="25 V", Automotive=No, Category=Cap, ComponentLink2Description=Datasheet, ComponentLink2URL=https://content.kemet.com/datasheets/KEM_C1003_C0G_SMD.pdf, Device Class L1="Passive Components", Device Class L2=Capacitors, Device Class L3="Ceramic Capacitors", Digikey Description="CAP CER 10000PF 25V 5% NP0 0805", Height=0.88mm, Ipc Land Pattern Name=CAPC200125X78, Lead Free=Yes, Material=Ceramic, Mouser Description="Multilayer Ceramic Capacitors MLCC - SMD/SMT 25volts 10000pF 5% C0G", Octopart=https://octopart.com/c0805c103j3gactu-kemet-12563663, RoHS=TRUE
C15 C19: library part CMP-2007-01007-2, "CAP CER 4.7UF 10V X5R 0805", Case Code (Imperial)=0805, Case Code (Metric)=2012, Dielectric=X5R, Dielectric Material=Ceramic, Max Operating Temperature=85°C, Min Operating Temperature=-55°C, Package Quantity=1, Tolerance=10%, Voltage=10V, Capacitance=4.7uF, Case/Package=0805, Construction=Flat, Depth=1.25mm, Dissipation Factor=5%, Height=1.25mm, Lead Free="Lead Free", Lead Pitch=0.75mm, Length=2mm, Mount="Surface Mount", Number of Pins=2, Packaging="Tape and Reel", Radiation Hardening=No, REACH SVHC="No SVHC", RoHS Compliant=Yes, Series=C, Termination=SMD/SMT, Thickness=0.055inch, Voltage Rating=10V, Voltage Rating (DC)=10V, Width=1.2mm
D1: library part CMP-2000-04993-2, "DIODE GEN PURP 100V 150MA SOD123", Average Rectified Current=150mA, Capacitance=4pF, Forward Voltage=1V, Max Forward Surge Current (Ifsm)=1A, Max Operating Temperature=150°C, Max Repetitive Reverse Voltage (Vrrm)=100V, Max Reverse Leakage Current=5uA, Max Surge Current=2A, Min Operating Temperature=-65°C, Package Quantity=3000, Power Dissipation=400mW, Current Rating=150mA, Element Configuration=Single, Forward Current=150mA, Height=1.2mm, Lead Free="Lead Free", Length=2.85mm, Max Reverse Voltage (DC)=100V, Mount="Surface Mount", Number of Pins=2, Output Current=150mA, Packaging="Tape and Reel", Peak Non-Repetitive Surge Current=2A, Polarity=Standard, Radiation Hardening=No, Recovery Time=4ns, Reverse Recovery Time=4ns, Voltage Rating (DC)=100V, Width=1.8mm
DS1 DS2 DS3 DS4: library part CMP-2000-05062-1, "Chip LED, Green, 2.2 V, -40 to 85 degC, 2-Pin SMD, Pb-Free, Tape and Reel", Forward Current If=20mA, Forward Voltage=2.2V, Forward Voltage VF Max=2.6V, LED Colour=Green, Manufacturer=Avago, Operating Temperature Max=85degC, Operating Temperature Min=-30degC, Operating Temperature Range=-30degCto+85degC, Opto Case Style=SMD, Package Description="2-Pin Surface Mount Device, Body 2 x 1.25 mm, Height 0.8 mm", Package Reference=HSMX-C170, Storage Temperature Min=-40degC, Bulb Size=1.25mmx1.4mm, Datasheet URL=https://datasheet.ciiva.com/29280/180495-da-01-en-chip-led-hsmg-c170-gelb-gruen-29280971.pdf, Datasheet Version=Oct-08, Dominant Wavelength=572nm, Dominant Wavelength Typ=572nm, External Depth=0.8mm, External Length / Height=2mm, External Width=1.25mm, Forward Current If Max=20mA, LED Mounting=SMD, LED Type=Standard, Lens Shape=Rectangular, Light Area Height=1mm, Luminous Intensity=15mcd, Luminous Intensity Min=4mcd, Luminous Intensity Typ=15mcd, Manufacturer URL=http://www.avagotech.com/, Mounting Type=SMD, MSL=MSL2A-4weeks, No. of Pins=2, Opto Mounting Orientation=Top, Packaging=CutTape, Peak Forward Current=20mA, Peak Wavelength=570nm, PIV Max=5V, Storage Temperature Max=85degC, SVHC=NoSVHC(16-Jun-2014), Viewing Angle=170deg, Voltage Vf Typ=2.2V, Wavelength Typ=570nm
F1: library part CMP-005-00013-1, "Polymeric PTC Resettable Fuse 15V 500mA Ih Surface Mount 1812 (4532 Metric), Concave", Case/Package="1812 Littelfuse Inc.", Availability=Good, Check_prices=https://www.snapeda.com/parts/1812L050PR/Littelfuse%20Inc./view-part/46902/?ref=eda, Component Type=Standard, Design Item ID=1812L050PR, MF="Littelfuse Inc.", MP=1812L050PR, Pins=2, Price=None, Purchase-URL=https://pricing.snapeda.com/search/part/1812L050PR/?ref=eda, SnapEDA_Link=https://www.snapeda.com/parts/1812L050PR/Littelfuse%20Inc./view-part/46902/?ref=snap, Source=1812L050PR.SchLib
FB1 FB2: library part CMP-07252-000001-1, "FERRITE BEAD 30 OHM 0805 1LN", Impedance At Frequency="30Ω @ 100MHz", Manufacturer=Bourns, Package=MH2029, Resistance=30Ω, Rms Current=3A, Series Resistance=25mΩ, Temperature="-55°C to +125°C", Temperature Range High=+125°C, Temperature Range Low=-55°C, Tolerance=25%, Automotive=No, Category=FBead, ComponentLink2Description=Datasheet, ComponentLink2URL=https://www.bourns.com/docs/Product-Datasheets/mh.pdf, Core Material=Ferrite, Device Class L1="Passive Components", Device Class L2="EMI / RFI Components", Device Class L3="Ferrite Beads and Chips", Digikey Description="FERRITE BEAD 30 OHM 0805 1LN", Height=1.1mm, Ipc Land Pattern Name=CAPC200120X90, Lead Free=Yes, Manufacturer Part Number=MH2029-300Y, Mouser Description="Ferrite Beads 30 ohms 25% HIGH CURRENT", Octopart=https://octopart.com/mh2029-300y-bourns-756929, RoHS=TRUE
J1: library part CMP-2000-05888-3, "CONN HEADER VERT 2POS 2.5MM", Color=Natural, Contact Resistance=20mR, Current Rating=3A, Housing Color=White, Insulation Resistance=1GR, Max Operating Temperature=85°C, Max Voltage Rating (AC)=250V, Min Operating Temperature=-25°C, Connector Type="Male Pin", Contact Material=Brass, Contact Plating=Tin, Contact Type="Male Pin", Depth=5.75mm, Fastening Type=Detent, Housing Material=Polyamide, Lead Free="Lead Free", Lead Pitch=2.5mm, Length=7.4mm, Max Current Rating=3A, Max Voltage Rating (DC)=250V, Mount="Through Hole", Number of Contacts=2, Number of Positions=2, Number of Rows=1, Orientation=Straight, Packaging=Bulk, Pitch=2.5mm, REACH SVHC="No SVHC", Series=XH, Termination=Solder, Voltage Rating=250V, Voltage Rating (AC)=250V, Wire/Cable Gauge=22AWG
Q1 Q2 Q3 Q4: library part CMP-07173-000101-1, "MOSFET N-CH 50V 220MA SOT-23", Case/Package=SOT-23, Continuous Drain Current (ID)=220mA, Drain to Source Breakdown Voltage=50V, Drain to Source Resistance=3.5R, Gate to Source Voltage (Vgs)=20V, Input Capacitance=27pF, Max Operating Temperature=150°C, Max Power Dissipation=360mW, Min Operating Temperature=-55°C, On-State Resistance=6R, Package Quantity=1, Threshold Voltage=1.3V, Contact Plating=Tin, Current Rating=220mA, Drain to Source Voltage (Vdss)=50V, Dual Supply Voltage=50V, Element Configuration=Single, Fall Time=9ns, Height=0.93mm, Lead Free="Lead Free", Length=2.92mm, Mount="Surface Mount", Nominal Vgs=1.3V, Number of Elements=1, Number of Pins=3, Packaging="Tape and Reel", Power Dissipation=360mW, Radiation Hardening=No, Rds On Max=3.5R, REACH SVHC="No SVHC", Rise Time=9ns, Termination=SMD/SMT, Turn-Off Delay Time=20ns, Turn-On Delay Time=2.5ns, Voltage Rating (DC)=50V, Weight=0.03g, Width=1.3mm
R1 R10: library part CMP-2001-03692-2, "RES Thick Film, 22Ω, 1%, 0.125W, 100ppm/°C, 0805", Case Code (Imperial)=0805, Case Code (Metric)=2012, Max Operating Temperature=155°C, Max Power Dissipation=125mW, Min Operating Temperature=-55°C, Package Quantity=5000, Resistance=10k, Temperature Coefficient=100ppm/°C, Tolerance=1%, Voltage Rating=150V, Case/Package=0805, Composition="Thick Film", Contact Plating=Tin, Depth=1.25mm, Features="Automotive AEC-Q200", Height=0.45mm, Lead Free="Lead Free", Length=2mm, Military Standard=Not, Mount="Surface Mount", Number of Terminations=2, Packaging="Tape and Reel", Power Rating=125mW, Radiation Hardening=No, Termination=SMD/SMT, Voltage Rating (DC)=150V, Weight=0.000194oz, Width=1.25mm
R2 R3 R4 R6: library part CMP-1013-00454-2, "Thick Film Chip Resistors 0805 330Ω 0.125W 1% 100ppm/°C", Case Code (Imperial)=0805, Case Code (Metric)=2012, Max Operating Temperature=155°C, Min Operating Temperature=-55°C, Package Quantity=5000, Power Rating=125mW, Resistance=330R, Temperature Coefficient=100ppm/°C, Tolerance=1%, Voltage Rating=150V, Case/Package=0805, Composition="Thick Film", Contact Plating=Tin, Depth=1.25mm, Height=0.5mm, Length=2mm, Military Standard=Not, Mount="Surface Mount", Packaging="Tape and Reel", Radiation Hardening=No, REACH SVHC="No SVHC", Termination=SMD/SMT, Thickness=508um, Voltage Rating (DC)=150V, Width=1.25mm
R5 R7: library part CMP-2001-03692-2, "RES Thick Film, 22Ω, 1%, 0.125W, 100ppm/°C, 0805", Case Code (Imperial)=0805, Case Code (Metric)=2012, Max Operating Temperature=155°C, Max Power Dissipation=125mW, Min Operating Temperature=-55°C, Package Quantity=5000, Resistance=22R, Temperature Coefficient=100ppm/°C, Tolerance=1%, Voltage Rating=150V, Case/Package=0805, Composition="Thick Film", Contact Plating=Tin, Depth=1.25mm, Features="Automotive AEC-Q200", Height=0.45mm, Lead Free="Lead Free", Length=2mm, Military Standard=Not, Mount="Surface Mount", Number of Terminations=2, Packaging="Tape and Reel", Power Rating=125mW, Radiation Hardening=No, Termination=SMD/SMT, Voltage Rating (DC)=150V, Weight=0.000194oz, Width=1.25mm
R8 R9 R11 R12 R13 R14 R15 R16: library part CMP-2003-04883-1, Manufacturer="Vishay Dale", Part Number=CRCW120610K0FKEAHP
R17: library part CMP-2001-03692-2, "RES Thick Film, 22Ω, 1%, 0.125W, 100ppm/°C, 0805", Case Code (Imperial)=0805, Case Code (Metric)=2012, Max Operating Temperature=155°C, Max Power Dissipation=125mW, Min Operating Temperature=-55°C, Package Quantity=5000, Resistance=0ohm, Temperature Coefficient=100ppm/°C, Tolerance=1%, Voltage Rating=150V, Case/Package=0805, Composition="Thick Film", Contact Plating=Tin, Depth=1.25mm, Features="Automotive AEC-Q200", Height=0.45mm, Lead Free="Lead Free", Length=2mm, Military Standard=Not, Mount="Surface Mount", Number of Terminations=2, Packaging="Tape and Reel", Power Rating=125mW, Radiation Hardening=No, Termination=SMD/SMT, Voltage Rating (DC)=150V, Weight=0.000194oz, Width=1.25mm
RV1 RV2: library part CMP-0584-00001-2, "ESD Protector, 5 V Supply, -40 to 85 degC, 1.6 x 0.8 x 0.55 mm SMD, RoHS, Tape and Reel", Manufacturer=Bourns, Operating Temperature="-40 to 85 degC", CO="0.5 pF", ComponentLink1Description="Manufacturer URL", ComponentLink1URL=http://www.bourns.com/, ComponentLink2Description=Datasheet, ComponentLink2URL=http://www.bourns.com/data/global/pdfs/MLC.pdf, DatasheetVersion="Rev. S", Mounting Technology="Surface Mount", PackageDescription="2-Pin SMD, Body 1.6 x 0.8 mm, Pitch 1.52 mm", PackageReference=CG0603-2, Packing="Tape and Reel", PartNumber=CG0603MLC-05E, RoHS=TRUE, RT="1 ns", VC="20 V", VDC="5 V", VT="150 V"
SW1: library part CMP-00287-55640044-1, "EVQ-11L05R Switch Tactile N.O. SPST Round Button PC Pins 0.02A 15VDC 1.6N Thru-Hole Radial T/R", Case/Package=Radial, Contact Current Rating=20mA, Contact Resistance=50mΩ, Max Operating Temperature=70°C, Max Voltage Rating (DC)=15V, Min Operating Temperature=-20°C, Operating Force=1.6N, Actuator Length=1.1mm, Current Rating=20mA, Depth=6mm, Electrical Life=100kcycles, Height=5mm, Illumination Type="Illuminated, Non-Illuminated", Lead Free="Lead Free", Length=6mm, Life (Cycles)=100kcycles, Max Current Rating=20mA, Mechanical Life=100kcycles, Mount="Through Hole", NexarPartId=55640044, Number of Positions=2, Orientation=Straight, Radiation Hardening=No, REACH SVHC=Unknown, RoHS=Compliant, Switch Function=Off-Mom, Switch Travel=250µm, Termination="PC Pin", Throw Configuration=SPST, Voltage Rating (DC)=15V
U1: library part CMP-0095-00580-1, "8-bit AVR Microcontroller, 2.7-5.5V, 16MHz, 32KB Flash, 1KB EEPROM, 2.5KB SRAM, USB Controller, 44-pin TQFP, Industrial Grade (-40°C to 85°C), Int RC", ComponentLink1Description="Manufacturer URL", ComponentLink1URL=http://www.atmel.com/, ComponentLink2Description="ATmega16U4/32U4 Datasheet", ComponentLink2URL=http://www.atmel.com/dyn/resources/prod_documents/doc7766.pdf, ComponentLink3Description="ATmega16U4 ATmega32U4 Summary", ComponentLink3URL=http://www.atmel.com/dyn/resources/prod_documents/7766S.pdf, DatasheetVersion="revF, Nov-2010", PackageDescription="44-Pin Plastic Thin Quad Flat Pack, 10 x 10 x 1.0 mm Body, 0.8 mm Pitch (TQFP)", PackageReference=44ML, PackageVersion="rev.G, Jul-2007"
U2: library part CMP-0395-00256-2, "Single Output Low Noise LDO, 400 mA, Fixed 3.3 V Output, 1.7 to 5.5 V Input, with Reverse Current Protection, 5-pin SOT-23 (DBV), -40 to 85 degC, Green (RoHS & no Sb/Br)", Manufacturer="Texas Instruments", Rating=Catalog, Accuracy(%)=1, Code_JEDEC=MO-178, ComponentLink1Description="Manufacturer URL", ComponentLink1URL=http://www.ti.com/, ComponentLink2Description=Datasheet, ComponentLink2URL=http://www.ti.com/general/docs/lit/getliterature.tsp?genericPartNumber=TPS73633&fileType=pdf, ComponentLink3Description="Package Specification", ComponentLink3URL=http://www.ti.com/litv/pdf/mpds018i, ComponentLink4Description="URL Link1", ComponentLink4URL="Samples URL:http://www.ti.com/product/tps73633#samples", DatasheetVersion=SBVS038T, Eco-Plan="Green (RoHS & no Sb/Br)", Fixed Output Options(V)=3.3, Iout(Max)(A)=0.4, Iq(Typ)(mA)=0.3, Mounting Technology="Surface Mount", PackageDescription="5-Pin Plastic Small Outline, Body 1.60 Ãƒâ€” 2.90 mm, Pitch 0.95 mm", PackageReference=DBV0005A, PackageVersion=4073253-4/K, PartNumber=TPS73633DBVR, SubFamily="Single Channel LDO", Vdo(Typ)(mV)=75, Vin(Max)(V)=5.5, Vin(Min)(V)=1.7, Vout Adj(Max)(V)=3.3, Vout Adj(Min)(V)=3.3
U3: library part CMP-04917-000259-2, "IC REG LIN 2.85V 250MA SOT23-5", Case/Package=SOT-23-5, Dropout Voltage=250mV, Max Input Voltage=5.5V, Max Operating Temperature=125°C, Min Input Voltage=2.2V, Min Operating Temperature=-40°C, Output Current=250mA, Output Voltage=2.85V, Package Quantity=3000, Power Supply Rejection Ratio (PSRR)=82dB, Quiescent Current=12uA, Lead Free="Lead Free", Number of Outputs=1, Output Type=Fixed, Packaging="Tape and Reel", RoHS Compliant=Yes
U4: library part CMP-007-000000-1, "Capacitance-to-Digital Converter 17 b IÂ²C, SPI 24-QFN (4x4)", Package="QFN-24 ScioSense", Check_prices=https://www.snapeda.com/parts/PCAP04-AQFM-24/ScioSense/view-part/?ref=eda, Component Type=Standard, Design Item ID=PCAP04-AQFM-24, MF=ScioSense, MP=PCAP04-AQFM-24, Pin Count=25, SnapEDA_Link=https://www.snapeda.com/parts/PCAP04-AQFM-24/ScioSense/view-part/?ref=snap, Source=PCAP04-AQFM-24.SchLib
USB1: library part CMP-1502-03227-2, Color=White, Contact Resistance=20mΩ, Current Rating=1.5A, Flammability Rating="UL94 V-0", Insulation Resistance=1GΩ, Max Operating Temperature=105°C, Min Operating Temperature=-40°C, Operating Supply Voltage=30V, Connector Type=USB, Contact Material=Copper, Contact Plating=Gold, Gender=Receptacle, Insulation Material=PBT, Lead Free="Lead Free", Length=15.8mm, Mount="Horizontal, Through Hole", NexarPartId=21041530, Number of Contacts=4, Number of Pins=4, Number of Ports=1, Number of Positions=4, Orientation=Horizontal, REACH SVHC=Unknown, RoHS=Compliant, Termination=Solder, USB Standard="USB 2.0", Voltage Rating=30V, Voltage Rating (DC)=30V, Width=14.4mm
Y1: library part CMP-009-000000-1, "CMOS Oscillator Enable/Disable 4-SOJ, 5.08mm pitch", Package=None, Availability=Unavailable, Component Type=Standard, Design Item ID=ECS-8FMX-160-TR, MP=ECS-8FMX-160-TR, Pin Count=4, Price=None, Source=ECS-8FMX-160-TR.SchLib

## Free pads (board coordinates)
  round 2 smd: 2(14.605,-14.351) 3(14.605,-18.669) 4(14.605,-22.606) 6(-0.038,-22.733) 7(-24.511,-32.639) 15(-20.955,-23.495)
  round 1 smd: 5(23.368,-27.813) 9(44.196,-13.97) 11(-18.034,-6.604) 13(22.352,13.335) 16(34.544,3.81)

## Via types
v1: diameter 1.27, hole 0.711, Top Layer to Bottom Layer, 33 vias
v2: diameter 1.5, hole 0.85, Top Layer to Bottom Layer, 1 vias
v3: diameter 1.5, hole 0.9, Top Layer to Bottom Layer, 1 vias
v4: diameter 1.27/1.27/1.27/1.27 (per signal layer), hole 0.711, Top Layer to Bottom Layer, 1 vias
v5: diameter 1.5, hole 0.8, Top Layer to Bottom Layer, 1 vias

## Nets (pads, with @x,y where several pads share a name; then routed paths per layer and width w, separated by ;. In a path a pad name is that pad's centre, name@x,y a point inside that pad or via, vN(x,y) a via of type N, cw(c..) or ccw(c..) an arc to the next point about the centre after c; other vN are vias at no path point)
+1.8V: C17.1 C19.1 pad.16 U3.5 U4.3 | length 12.2
  Top Layer w0.254: U4.3@29.234,1.905 30.988,1.905
  Top Layer w0.3: 30.988,1.905 31.181,2.098 32.131,2.098 ; C19.1 32.258,1.971 32.131,2.098 ; pad.16 34.544,2.098 ; C17.1 34.798,2.098 ; U3.5 34.798,2.098 ; 32.131,2.098 34.544,2.098 ; 34.544,2.098 34.798,2.098
+3.3V: C15.1 C16.1 C18.1 pad.13 Q1.1 Q2.1 Q3.1 Q4.1 R9.2 R10.2 R12.2 R14.2 R16.2 U2.5 U3.1 U3.3 U4.4 U4.14 | length 92.4
  Top Layer w0.254: v1(21.971,-3.81) 22.098,-3.937 22.098,-6.372 R9.2 22.225,-6.372 23.39,-6.372 23.749,-6.731 23.749,-9.779 24.191,-10.221 Q1.1 ; v1(26.035,-4.318) 26.67,-4.953 R12.2 ; R12.2@26.67,-6.626 27.918,-6.626 27.94,-6.604 28.128,-6.792 Q2.1 ; U4.4 30.095,2.409 ; v1(30.734,-4.445) R14.2 30.756,-6.35 32.004,-6.35 32.258,-6.604 32.258,-10.414 31.999,-10.673 Q3.1 ; R16.2 36.576,-6.372 ; Q4.1 35.814,-11.049 36.576,-10.287 36.576,-6.372 ; v1(38.735,-6.477) 38.63,-6.372 36.576,-6.372
  Top Layer w0.3: v1(21.971,-3.81) 21.971,1.651 23.229,2.909 U4.14
  Top Layer w0.33: v1(21.59,7.62) R10.2 24.184,8.109 24.122,8.159 22.604,8.967 22.477,9.094 22.473,9.225 pad.13 ; 30.095,2.409 30.607,2.921 31.75,2.921 ; C18.1 31.75,2.921 ; U3.1 39.177,2.098 39.751,1.524 40.703,1.524 ; U3.3 39.304,3.998 40.005,4.699 40.767,4.699 ; C16.1 40.767,1.46 40.703,1.524 ; 31.75,2.921 32.766,2.921 33.274,3.429 33.274,5.588 34.671,6.985 38.227,6.985 v1(38.481,6.731) 39.497,6.731 40.767,5.461 40.767,4.699 ; 40.703,1.524 41.656,1.524 42.164,2.032 42.164,4.064 41.529,4.699 40.767,4.699
  Top Layer w0.4: v5(30.226,11.049) 31.049,11.872 31.049,12.159 ; U2.5 31.049,12.159 ; C15.1 32.884,12.159 31.049,12.159
AREF: C11.1 U1.42 | length 7.7
  Top Layer w0.3: C11.1 -10.668,-37.973 -10.287,-37.592 -7.493,-37.592 -6.109,-36.208 U1.42
AVCC1: C1.1 C2.1 C4.1 C5.1 C6.1 C7.1 C8.1 C9.1 C12.1 C13.1 D1.1 DS1.1 DS2.1 DS3.1 DS4.1 F1.2 FB1.2 pad.7 pad.11 R1.2 R8.2 R11.2 R13.2 R15.2 U1.2 U1.7 U1.14 U1.24 U1.34 U2.1 U2.3 Y1.1 Y1.4 | length 144.7
  Top Layer w0.254: U1.7 -2.815,-28.747 0.971,-28.747 v1(1.016,-28.702)
  Top Layer w0.3: v1(-33.401,-20.447) -32.131,-19.177 DS3.1 ; -32.893,-20.955 -32.258,-21.59 DS1.1
  Top Layer w0.4: D1.1 -36.068,-20.701 ; C9.1 -36.068,-20.701 ; v1@-33.401,-20.828 v1(-33.401,-20.447) ; C8.1 -32.893,-20.955 v1(-33.401,-20.447) ; DS2.1@-20.701,-33.714 -20.701,-32.131 v1@-19.304,-30.734 ; C5.1@-7.874,-18.669 -6.985,-18.669 -6.096,-19.558 v1(-6.096,-20.574) -6.096,-23.928 U1.14 ; R1.2 v1(3.302,-20.193) ; DS4.1@4.814,-42.973 DS4.1 ; v1(21.971,-22.86) 21.971,-20.806 R8.2 ; v1(26.289,-22.86) R11.2 ; U2.3 29.149,17.333 28.194,18.288 28.194,20.828 29.083,21.717 30.988,21.717 32.004,20.701 32.004,17.907 ; v1(29.845,-22.987) R13.2 ; U2.1 31.049,16.952 32.004,17.907 ; C13.1 33.401,17.907 32.004,17.907 ; v1(34.163,-23.114) R15.2 ; -36.068,-20.701 -33.655,-20.701 v1(-33.401,-20.447)
  Top Layer w0.5: Y1.1 -34.29,-6.477 -35.052,-5.715 -35.052,-1.397 -34.417,-0.762 -22.733,-0.762 -21.59,-1.905 -21.59,-3.798 C7.1 -20.066,-4.052 -20.066,-6.604 ; pad.7 -24.638,-32.639 -22.733,-30.734 ; Y1.4 -23.413,-6.604 -20.066,-6.604 ; C6.1 -22.733,-30.734 ; v1(-20.066,-8.001) -20.066,-6.604 ; pad.11 -20.066,-6.604 ; v1(-15.24,-40.767) -15.24,-40.64 -14.097,-39.497 C4.1 -13.081,-37.719 -12.509,-37.147 U1.34 ; U1.24 -16.878,-26.391 C2.1 -17.792,-29.476 -18.796,-30.48 v1(-19.05,-30.48) -19.304,-30.734 -22.733,-30.734 ; v1(-6.223,-43.434) -4.445,-41.656 FB1.2@-4.445,-39.927 ; U1.2 -0.483,-32.791 0.127,-33.401 C1.1 3.822,-34.429 v3(4.191,-34.798)
  Top Layer w0.7: v3(4.191,-34.798) 4.814,-35.421 C12.1 DS4.1@4.814,-42.973
  Top Layer w0.8: C12.1 6.223,-39.624 6.731,-40.132 F1.2
  other v4: 30.099,21.717
AVCC2: C3.1 FB1.1 U1.44 | length 5
  Top Layer w0.3: U1.44 -4.445,-35.305 FB1.1 -2.191,-37.878 C3.1
CapPlate: U4.22 | length 3.7
  Top Layer w0.254: U4.22 27.555,-2.028 v1(28.575,-3.048)
CLOCK: U1.17 Y1.3 | length 20.8
  Top Layer w0.3: Y1.3 -20.828,-11.557 -9.906,-22.479 -8.89,-22.479 -8.509,-22.86 U1.17
D_N: R5.1 RV2.2 USB1.2 | length 20.8
  Top Layer w0.254: USB1.2 USB1.2@28.956,-33.886
  Top Layer w0.3: R5.1 12.281,-32.893 12.321,-32.852 28.575,-32.852 28.926,-33.203 USB1.2
  Top Layer w0.381: RV2.2 12.319,-35.939 12.319,-33.909 R5.1
D_P: R7.1 RV1.2 USB1.3 | length 21.5
  Top Layer w0.254: USB1.3@30.182,-32.661 USB1.3
  Top Layer w0.3: R7.1 12.281,-32.258 12.321,-32.299 28.804,-32.299 29.008,-32.502 USB1.3
  Top Layer w0.381: R7.1 RV1.2
GND: C1.2 C2.2 C3.2 C4.2 C5.2 C6.2 C7.2 C8.2 C9.2 C10.2 C11.2 C12.2 C13.2 C14.2 C15.2 C16.2 C17.2 C18.2 C19.2 FB2.2 pad.15 R6.1 RV1.1 RV2.1 SW1.A U1.15 U1.23 U1.35 U1.43 U2.2 U3.2 U4.2 U4.8 U4.13 USB1.Shell Y1.2 | length 234.9
  Top Layer w0.254: v1(7.62,-35.814) 7.874,-36.068 RV2.1 ; U4.2 30.087,1.409
  Top Layer w0.3: C9.2 -36.068,-26.67 -34.417,-28.321 -32.893,-28.321 ; C8.2 -32.893,-28.321 ; v1(-26.416,-25.908) -28.829,-28.321 -32.893,-28.321 ; C5.2 -9.386,-20.816 v1(-9.398,-20.828) -8.636,-20.828 -6.909,-22.555 U1.15 ; C10.2 8.636,-28.321 10.307,-26.65 15.093,-26.65 v1(15.24,-26.797) ; v1(23.495,4.064) 24.15,3.409 U4.13 ; C14.2 24.13,12.065 23.241,11.176 23.241,10.16 24.003,9.398 37.592,9.398 38.354,10.16 38.354,12.319 v1(38.227,12.446) ; U4.8 28.055,5.068 v1(29.337,6.35) 29.464,6.223 C18.2 ; 30.087,1.409 30.607,0.889 30.607,-1.524 31.369,-2.286 32.385,-2.286 ; U2.2 v1(30.099,19.177) ; C19.2 32.258,-2.159 32.385,-2.286 ; C15.2@34.544,12.446 v1(38.227,12.446) ; C17.2 34.798,-2.286 ; C13.2 37.465,17.78 38.354,16.891 38.354,12.573 v1(38.227,12.446) ; U3.2 40.64,3.048 v1(40.767,3.175) ; C16.2 38.076,-1.754 v1(37.719,-1.397) 36.83,-2.286 34.798,-2.286 ; 32.385,-2.286 34.798,-2.286
  Top Layer w0.4: Y1.2 -32.467,-11.43 -35.687,-11.43 -38.481,-8.636 -38.481,-0.381 -36.195,1.905 -29.972,1.905 ; v1(-29.972,4.445) -29.972,1.905 ; pad.15 -20.955,-25.4 -20.828,-25.527 ; C7.2 -19.685,-2.171 -19.685,0.254 -21.336,1.905 -29.972,1.905 ; C2.2 -21.959,-27.305 C6.2 -25.515,-28.079 -26.416,-27.178 v1(-26.416,-25.908) -26.035,-25.527 -20.828,-25.527 ; C4.2 -17.272,-37.719 -18.034,-38.481 -18.034,-40.64 -13.843,-44.831 v1(-10.668,-44.831) ; U1.23 -14.223,-25.527 -20.828,-25.527 ; U1.35 -11.709,-38.252 -13.081,-39.624 -13.081,-42.418 v1(-10.668,-44.831) ; C11.2 v1(-10.668,-44.831) ; U1.43 -5.309,-36.424 -8.255,-39.37 -8.255,-42.418 v1(-10.668,-44.831) ; C3.2 0.103,-39.346 0.127,-39.37 v1(0.254,-39.497) ; RV1.1 v1(18.669,-31.242) ; FB2.2 28.607,-28.448 34.163,-28.448 USB1.Shell@36.195,-30.48
  Top Layer w0.5: R6.1 -1.893,-42.152 0,-40.259 v1@0,-39.497 ; v1@0.127,-39.37 C1.2 ; v1(0.254,-39.497) 0.381,-39.624 C12.2 ; USB1.Shell@36.195,-30.48 38.1,-28.575 v2(38.1,-24.892)
MISO: pad.2 Q1.3 R8.1 U1.11 | length 35.5
  Top Layer w0.254: U1.11 0.444,-25.591 9.906,-16.129 14.605,-16.129 ; pad.2 14.605,-16.129 ; R8.1 22.098,-17.018 ; Q1.3 23.241,-15.748 22.098,-16.891 22.098,-17.018 ; 14.605,-16.129 21.209,-16.129 22.098,-17.018
MISO2: Q1.2 R9.1 U4.10 | length 26.3
  Top Layer w0.254: Q1.2 22.291,-9.442 R9.1 20.806,-9.249 20.088,-8.531 20.088,3.832 21.717,5.461 26.416,5.461 26.67,5.207 27.051,4.826 27.051,4.088 U4.10
MOSI: pad.3 Q2.3 R11.1 U1.10 | length 44.8
  Top Layer w0.254: U1.10 1.041,-26.391 6.985,-20.447 14.605,-20.447 ; pad.3 14.605,-20.447 ; Q2.3 27.178,-15.367 26.289,-16.256 R11.1 24.87,-17.929 24.384,-18.415 24.384,-23.241 23.368,-24.257 21.209,-24.257 17.399,-20.447 14.605,-20.447
MOSI2: Q2.2 R12.1 U4.15 | length 18.5
  Top Layer w0.254: U4.15 23.618,2.409 23.241,2.032 23.241,-2.413 24.511,-3.683 24.511,-8.128 25.527,-9.144 26.565,-9.144 R12.1 ; Q2.2 26.228,-10.856 26.67,-10.414 R12.1@26.67,-9.376
NetC14_1: C14.1 U2.4 | length 4.1
  Top Layer w0.4: C14.1 28.702,12.065 29.21,12.573 29.21,13.523 U2.4
NetDS1_2: DS1.2 R2.2 | length 10.3
  Top Layer w0.3: DS1.2@-27.432,-21.463 DS1.2 -17.629,-21.59 R2.2
NetDS2_2: DS2.2 R3.2 | length 4.4
  Top Layer w0.3: DS2.2 -20.459,-35.699 -18.173,-35.699 -17.792,-35.318 -17.792,-33.933 R3.2
NetDS3_2: DS3.2 R4.2 | length 5.4
  Top Layer w0.254: DS3.2 -27.432,-19.05 -22.733,-19.05 R4.2 R4.2@-22.606,-19.304
NetDS4_2: DS4.2 R6.2 | length 2.7
  Top Layer w0.7: R6.2@0.127,-43.053 DS4.2
NetF1_1: F1.1 USB1.1 | length 14.9
  Top Layer w1: F1.1@14.859,-39.826 F1.1 18.415,-40.132 22.863,-35.684 USB1.1
NetJ1_1: J1.1 pad.9 U4.23 | length 28.7
  Top Layer w0.254: U4.23 28.055,-0.369 30.607,-2.921 36.449,-2.921 37.084,-3.556 39.878,-3.556 40.386,-4.064 40.386,-6.38 43.909,-9.903 J1.1 45.616,-10.448 pad.9
NetQ4_2: Q4.2 R16.1 R17.2 | length 15.7
  Top Layer w0.254: Q4.2 33.914,-10.79 34.671,-10.033 34.671,-9.376 R16.1 33.506,-9.122 33.02,-8.636 33.02,-5.08 33.401,-4.699 R17.2
PCAPLED: R4.1 U1.21 | length 12.4
  Top Layer w0.3: R4.1@-20.598,-19.177 R4.1 -14.224,-19.304 -11.709,-21.819 U1.21
RESET: D1.2 pad.6 R1.1 SW1.B U1.13 | length 60.4
  Top Layer w0.3: SW1.B -38.323,-16.066 D1.2 -32.545,-17.051 -25.273,-9.779 -21.209,-9.779 -14.605,-16.383 -7.747,-16.383 -3.619,-20.511 ; U1.13 -5.309,-22.2 -3.619,-20.511 ; R1.1 -2.197,-20.193 ; pad.6 -0.8,-22.733 -2.197,-21.336 -2.197,-20.193 ; -3.619,-20.511 -3.302,-20.193 -2.197,-20.193
RXLED: R3.1 U1.25 | length 8.4
  Top Layer w0.3: R3.1 -16.014,-27.571 -15.634,-27.191 U1.25
SCK: pad.4 Q3.3 R13.1 U1.9 | length 46.3
  Top Layer w0.254: U1.9 1.384,-27.191 4.445,-24.13 14.605,-24.13 ; pad.4 14.605,-24.13 ; Q3.3@30.988,-13.946 Q3.3 31.049,-15.179 29.845,-16.383 R13.1 28.658,-17.951 28.194,-18.415 28.194,-23.495 26.797,-24.892 20.701,-24.892 19.939,-24.13 14.605,-24.13
SCK2: Q3.2 R14.1 U4.16 | length 18.6
  Top Layer w0.254: U4.16 24.515,1.909 24.257,1.651 24.257,-0.381 25.908,-2.032 28.829,-4.953 28.956,-5.08 28.956,-8.636 29.442,-9.122 R14.1 30.48,-9.376 30.48,-10.414 30.099,-10.795 Q3.2
SS: pad.5 Q4.3 R15.1 U1.8 | length 51.1
  Top Layer w0.254: U1.8 -1.067,-27.991 -0.762,-27.686 2.159,-27.686 4.699,-25.146 19.304,-25.146 19.812,-25.654 23.368,-25.654 23.495,-25.654 ; pad.5 23.368,-25.781 23.495,-25.654 ; R15.1@33.931,-17.929 R15.1 R15.1@34.036,-17.929 ; Q4.3 34.864,-15.428 34.036,-16.256 34.036,-17.951 33.931,-18.056 32.617,-18.056 32.004,-18.669 32.004,-23.114 29.464,-25.654 23.495,-25.654
SS2: R10.1 R17.1 U4.9 | length 34.7
  Top Layer w0.254: R10.1 26.251,7.747 27.686,7.747 28.194,7.239 ; U4.9 27.555,6.6 28.194,7.239 ; R17.1 43.053,-4.699 43.18,-4.572 43.18,6.096 41.148,8.128 29.083,8.128 28.194,7.239
TXLED: R2.1 U1.22 | length 5.2
  Top Layer w0.3: R2.1 -13.462,-21.463 -12.509,-22.416 U1.22
UCAP: C10.1 U1.6 | length 8.2
  Top Layer w0.3: U1.6 -1.143,-29.591 -0.889,-29.845 2.032,-29.845 3.556,-28.321 C10.1
UGND: FB2.1 U1.5 USB1.4 | length 36.4
  Top Layer w0.4: U1.5 7.455,-30.391 9.017,-28.829 18.288,-28.829 19.939,-30.48 FB2.1 31.853,-30.48 USB1.4
USB_N: R5.2 U1.3 | length 14.9
  Top Layer w0.254: 10.556,-32.852 10.579,-32.829
  Top Layer w0.3: U1.3 -2.791,-31.923 2.651,-31.923 3.581,-32.852 10.556,-32.852 ; R5.2 10.579,-32.829
USB_P: R7.2 U1.4 | length 15
  Top Layer w0.3: U1.4 -2.681,-31.369 2.88,-31.369 3.81,-32.299 10.579,-32.299 R7.2
pads on no net: J1.2 U1.1 U1.12 U1.16 U1.18 U1.19 U1.20 U1.26 U1.27 U1.28 U1.29 U1.30 U1.31 U1.32 U1.33 U1.36 U1.37 U1.38 U1.39 U1.40 U1.41 U3.4 U4.1 U4.5 U4.6 U4.7 U4.11 U4.12 U4.17 U4.18 U4.19 U4.20 U4.21 U4.24 U4.25

## Polygon pours and split planes (outlines as drawn)
CapPlate on Bottom Layer "CAPPLATE_L04_P000" (solid, pour order 0): -42.58,0 ccw(c0,0) 0,-42.58 ccw(c0,0) 42.58,0 ccw(c0,0) 0,42.58 ccw(c0,0)
GND on GND "GND_L02_P023" (solid, pour order 23): -17.018,-38.862 -17.018,-46.482 -16.129,-47.371 -2.667,-47.371 -2.667,-38.481
GND on GND "GND_L02_P022" (solid, pour order 22): -46.377,-13.948 -46.609,-15.367 -46.609,-16.129 -46.691,-16.129 -47.625,-15.195 -47.625,-13.716
GND on GND "GND_L02_P021" (solid, pour order 21): -47.522,-15.118 -47.683,-2.482 -47.752,-2.413 -35.687,-2.413 -35.687,-14.859 -35.207,-15.339
GND on GND "GND_L02_P019" (solid, pour order 19): -43.805,-24.075 -41.594,-27.748 -40.767,-29.083 -40.259,-29.083 -36.83,-25.654 -39.116,-23.368 -43.434,-23.368
GND on GND "GND_L02_P018" (solid, pour order 18): -43.744,-24.218 -40.894,-18.161 -47.683,-15.044
GND on GND "GND_L02_P017" (solid, pour order 17): -46.863,-16.97 -44.704,-19.129 -44.704,-21.971 -37.338,-21.971 -36.195,-20.828 -44.185,-12.838 -44.185,-8.637
GND on GND "GND_L02_P016" (solid, pour order 16): -44.185,-8.637 -46.863,-11.315 -46.863,-16.97 -42.878,-20.955 -36.195,-20.955 -36.195,-20.828
GND on GND "GND_L02_P014" (solid, pour order 14): -40.894,-16.637 -44.704,-20.447 -44.704,-21.971 -39.878,-26.797 -38.735,-25.654 -31.242,-25.654
GND on GND "GND_L02_P013" (solid, pour order 13): -42.799,-8.763 -42.799,-11.684 -46.863,-15.748 -42.799,-19.812 -37.973,-19.812 -32.512,-14.351
GND on GND "GND_L02_P012" (solid, pour order 12): 40.748,-18.415 40.748,-28.967 31.456,-38.735 24.821,-43.404
GND on GND "GND_L02_P011" (solid, pour order 11): 29.718,-39.243 30.48,-39.243 36.703,-33.02 36.703,-32.431 36.53,-32.258 36.449,-32.258 36.449,-32.4 36.39,-32.459
GND on GND "GND_L02_P010" (solid, pour order 10): 40.005,-18.288 40.633,-28.843 26.194,-42.464 16.816,-39.955 24.638,-35.814 37.465,-22.987 37.465,-23.622 24.892,-36.195
GND on GND "GND_L02_P006" (solid, pour order 6): -45.037,0.127 ccw(c-0.127,0.127) -0.127,-44.783 ccw(c-0.127,0.127) 44.783,0.127 ccw(c-0.127,0.127) -0.127,45.037 ccw(c-0.127,0.127)
AVCC1 on PWR "AVCC1_L03_P025" (solid, pour order 25): -45.424,0 ccw(c0.127,0) 0.127,-45.551 ccw(c0.127,0) 45.678,0 ccw(c0.127,0) 0.127,45.551 ccw(c0.127,0)
+3.3V on PWR "+3.3V_L03_P024" (solid, pour order 24): 18.923,13.97 18.923,-11.557 42.418,-11.557 42.418,13.97

## Silkscreen, mask and mechanical layers (free items; w line width, h text height)
Top Overlay:
  text "Capacitive Torque Sensor" at -36.015,27.156 h1.3
  text "EN2160" at -26.416,23.368 h1.52
  text "TP2" at 18.161,12.827 h1
  text "TP5" at 33.474,4.708 h0.8
  text "TP3" at -18.342,-8.817 h1
  text "MISO" at 16.202,-15.294 h1
  text "TP1" at 43.18,-15.875 h1
  text "MOSI" at 16.075,-18.596 h1
  text "SCK" at 10.487,-22.66 h1
  text "GND" at -24.946,-24.438 h1
  text "TP4" at 24.457,-27.613 h1
  text "+5V" at -29.264,-32.566 h1

## Text inside footprints (layer, text, board x,y; h text height)
USB1: Mechanical 2 "PCB Edge" at 38.125,-44.813 h0.81 r45